# Altium PCB SPEC_A7_Management.PCBDOC (part 1 of 4)
Units mm, origin at the board's own origin, x right, y up, seen from the top; angles counter-clockwise.
Board outline 141.1 x 65.84 mm, 4 copper layers (Top Layer, Layer 1, Layer 2, Bottom Layer), stack 1.566 mm thick; 177 components, 176 nets, 698 pads, 409 vias.
Unrouted connection lines stored in the file: 4.
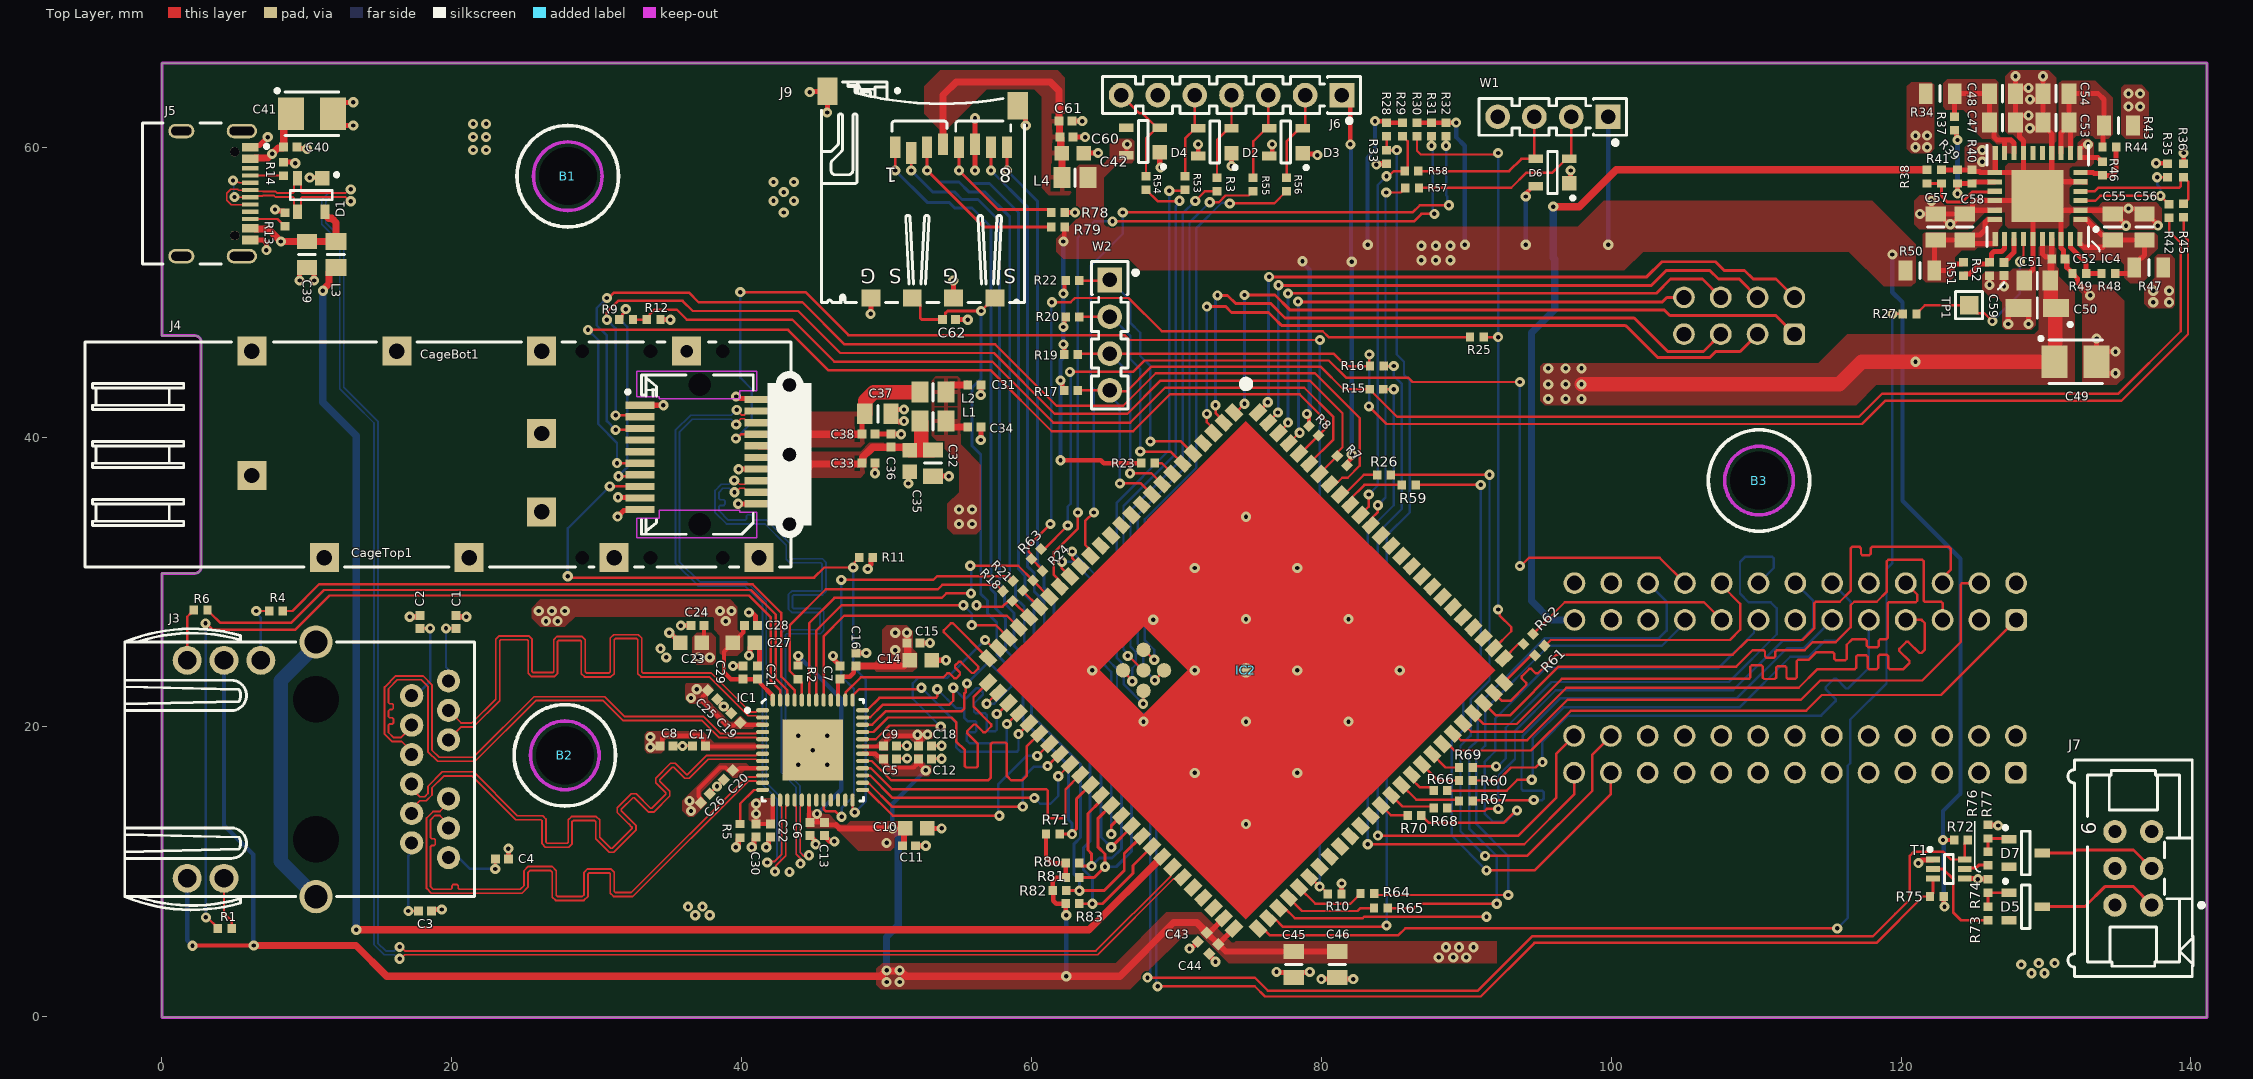
[diagram p0: Top Layer view]
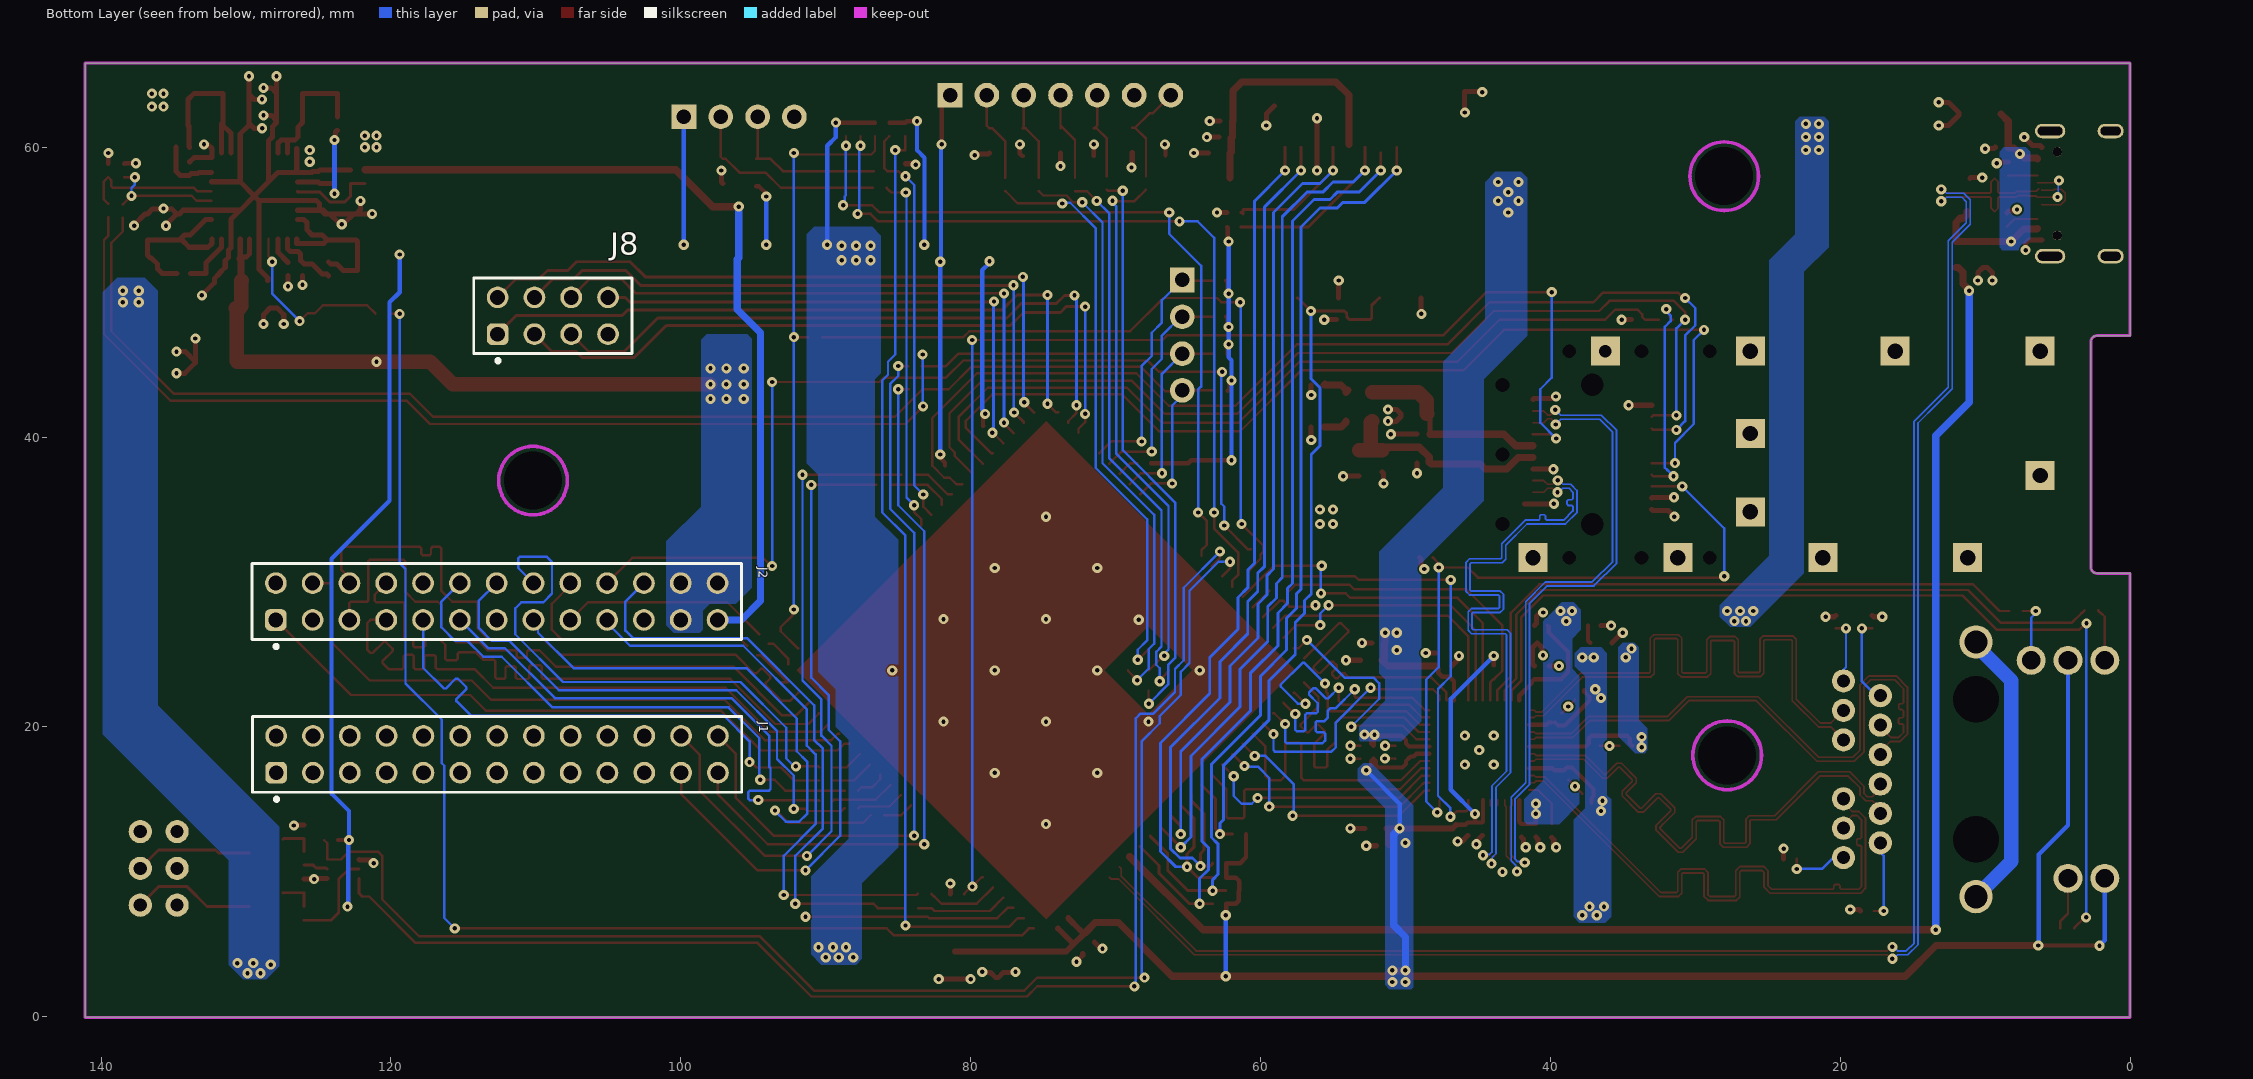
[diagram p1: Bottom Layer view, seen from below]
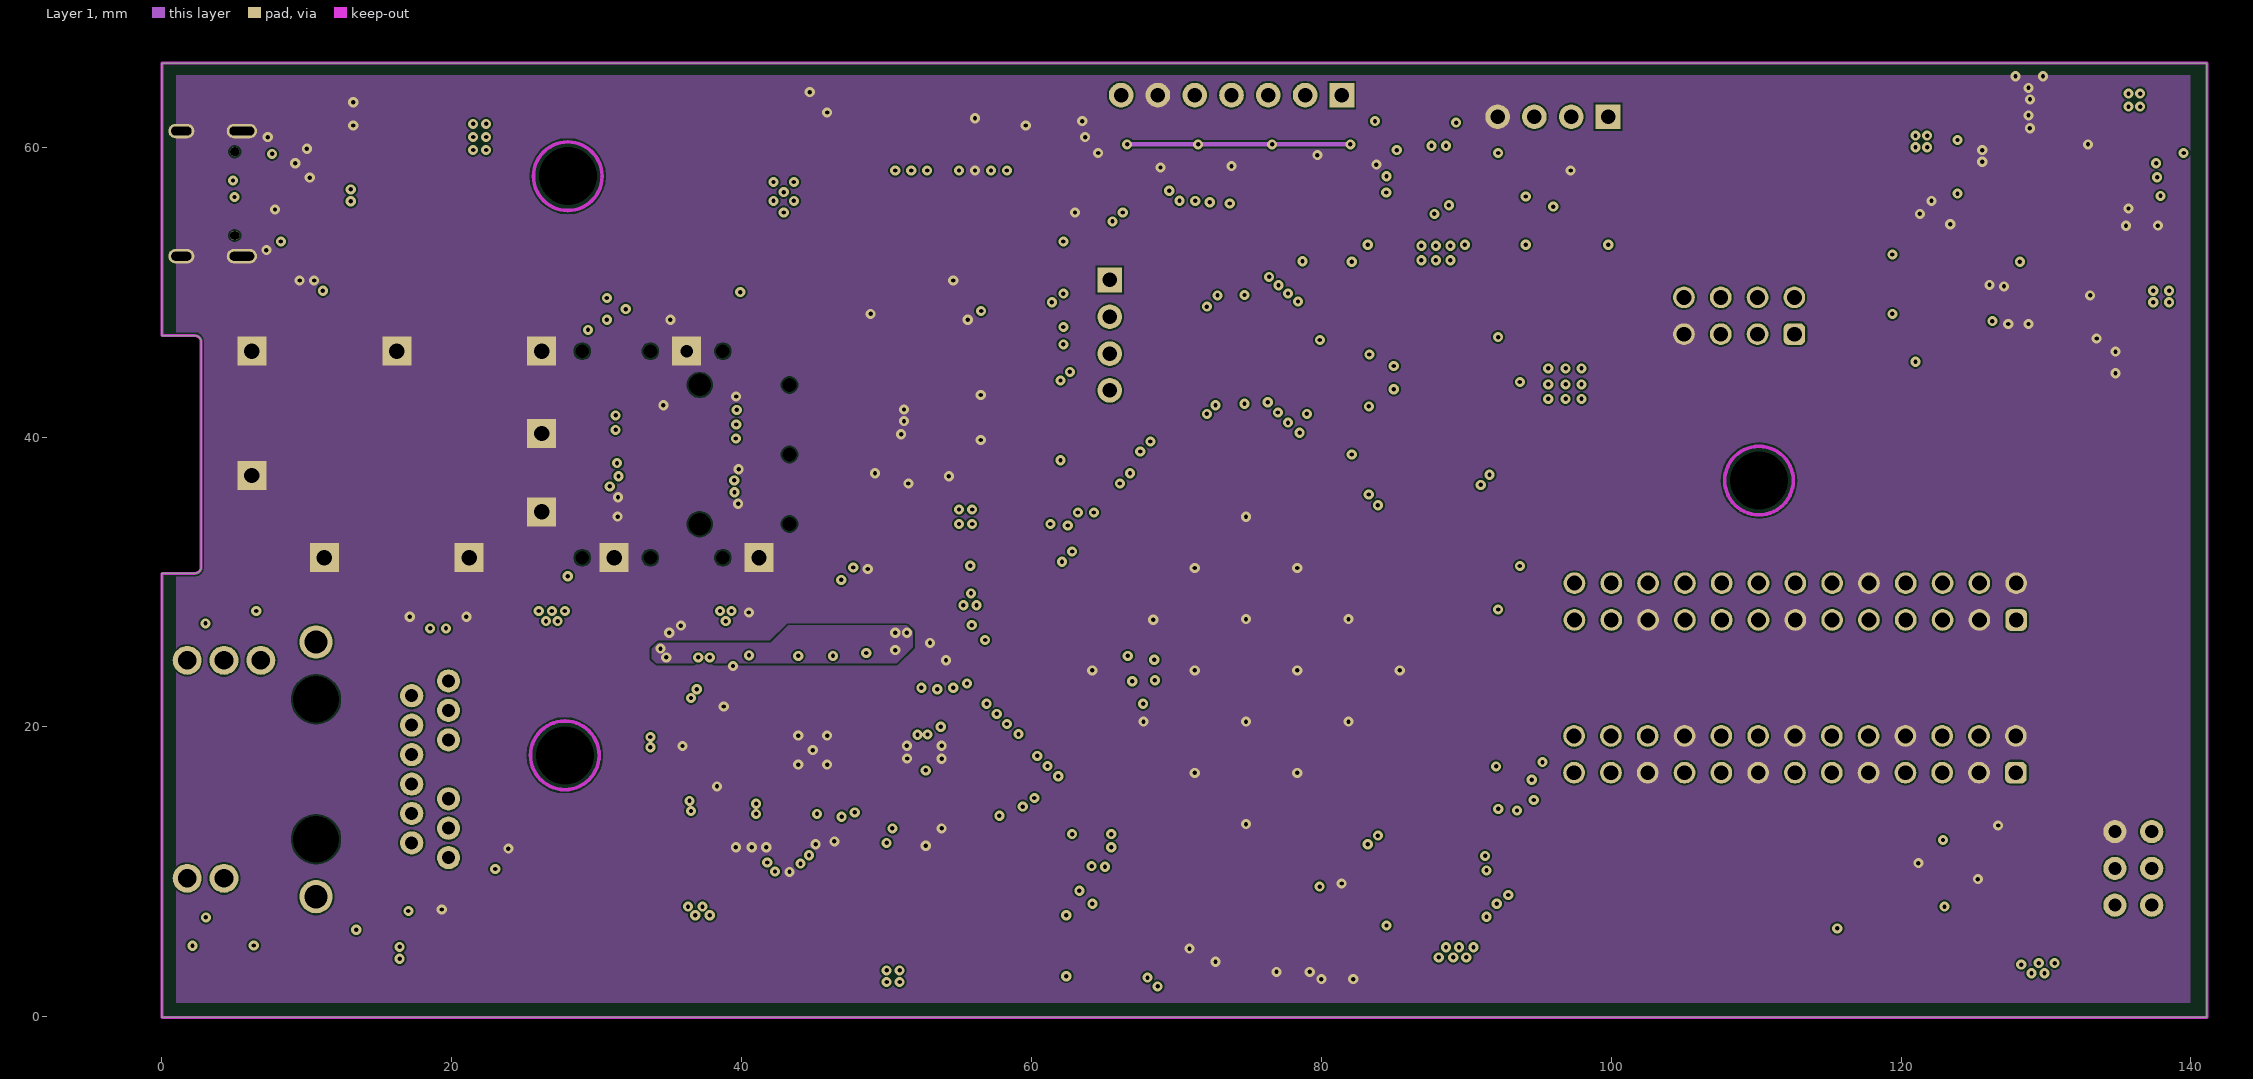
[diagram p2: Layer 1]
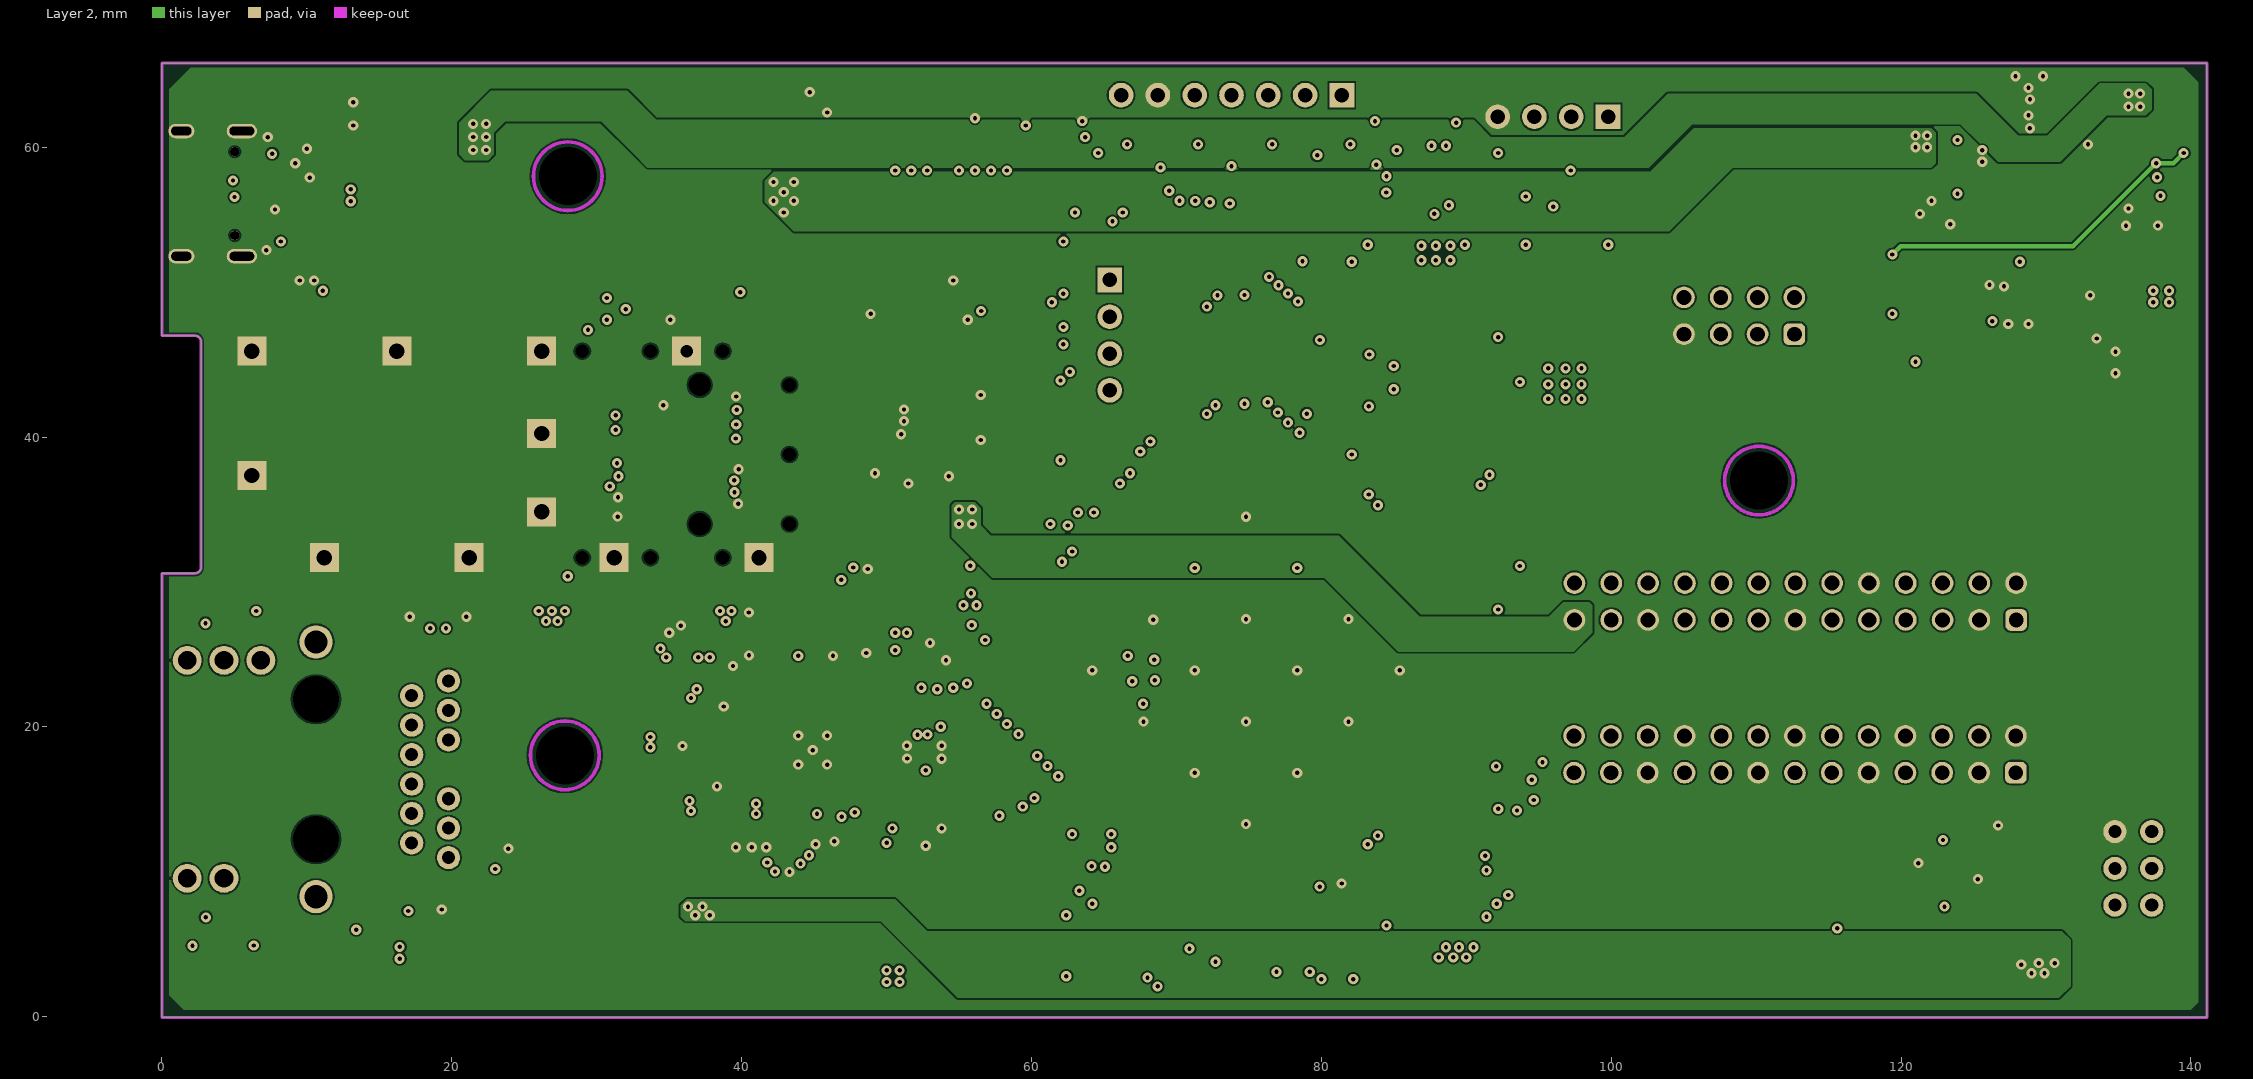
[diagram p3: Layer 2]
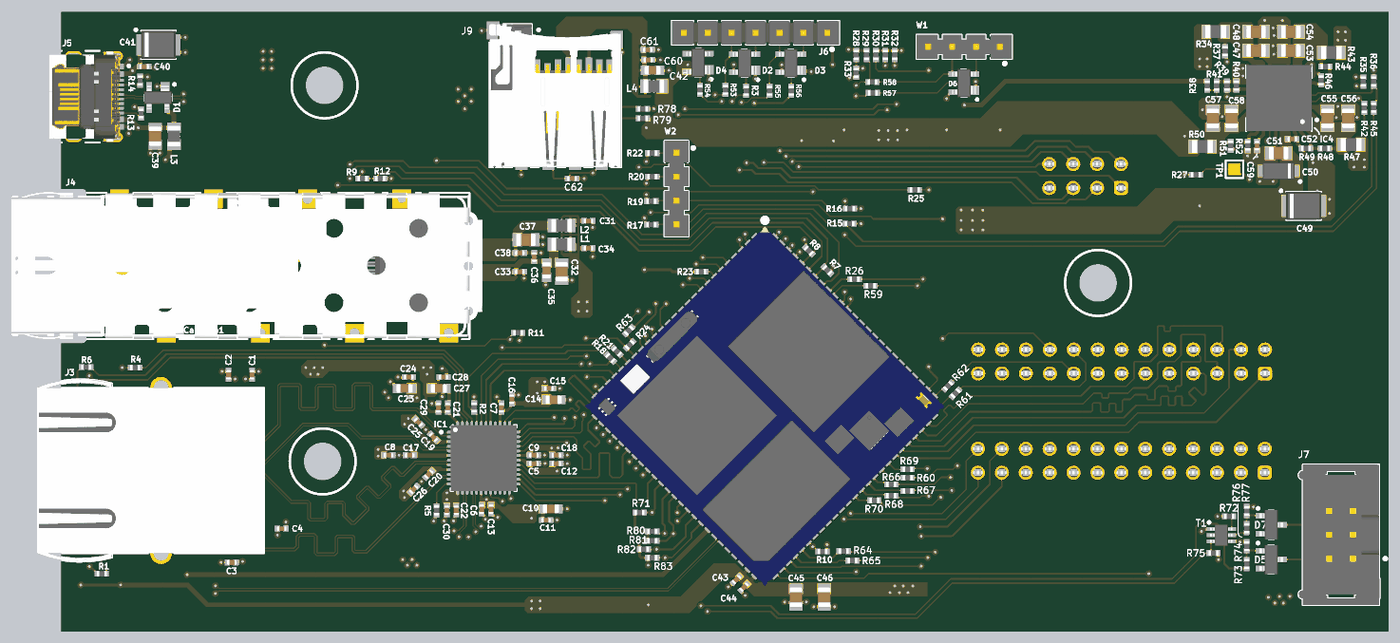
[diagram p6: 3D render of the assembled board from above, using the file's embedded part models]
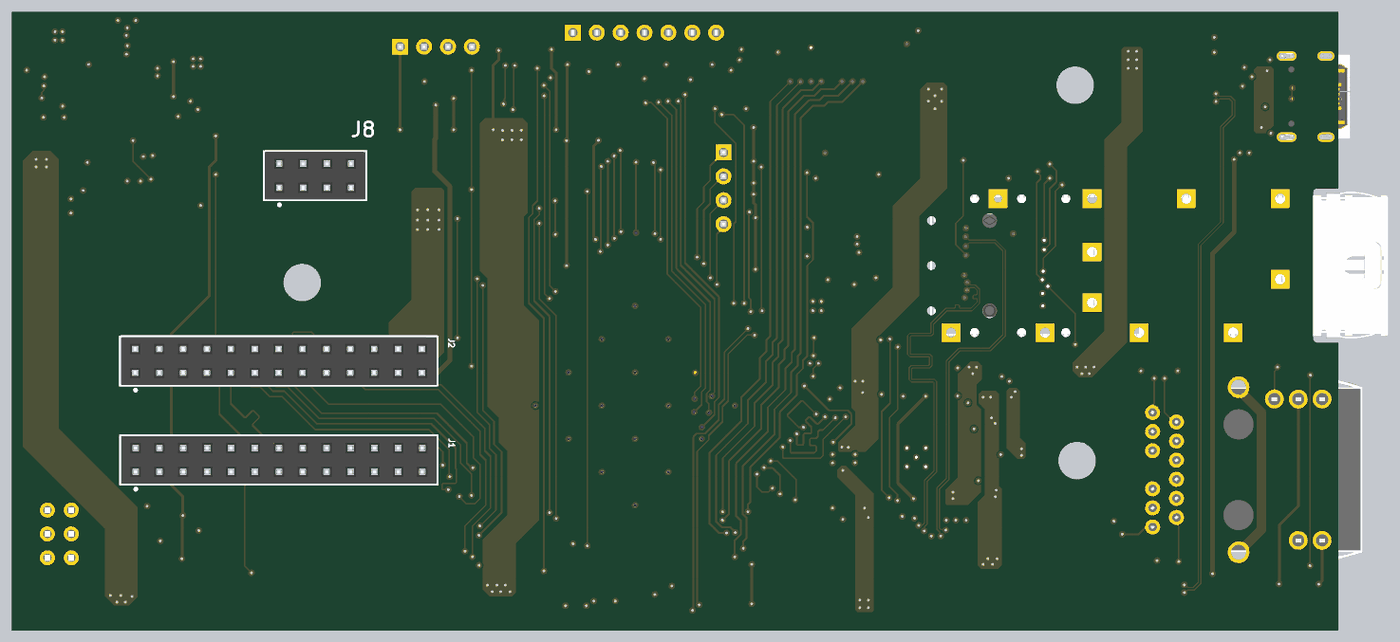
[diagram p7: 3D render of the assembled board from below, using the file's embedded part models]

## Layer stack, top to bottom
Top Solder: solder mask 0.0102, Solder Resist, Dk 3.5
Top Layer: signal copper 0.0325
Dielectric 2: prepreg 0.0994, PP-015, Dk 4.3
Layer 1: signal copper 0.0175
Dielectric 1: dielectric 1.2675, FR-4, Dk 4.8
Layer 2: signal copper 0.0175
Dielectric 3: prepreg 0.0994, PP-015, Dk 4.3
Bottom Layer: signal copper 0.0325
Bottom Solder: solder mask 0.0102, Solder Resist, Dk 3.5

## Board outline
0,-0.04 0,30.6 1,30.6 2.274,30.6 ccw(c2.274,31.026) 2.7,31.026 2.7,46.574 ccw(c2.274,46.574) 2.274,47 1,47 0,47 0,65.8 141.1,65.8 141.1,-0.04

## Design rules (kind name [scope] priority, off if disabled: settings)
Clearance [All] p1: gap=0.12 ignorepadtopadclearanceinfootprint=FALSE
DiffPairsRouting [All] p1: maxlimit=0.254 minlimit=0.15 mostfreqgap=0.254 toplayer_maxgap=0.15 toplayer_prefgap=0.15 toplayer_minwidth=0.123 toplayer_maxwidth=0.123 toplayer_prefwidth=0.123 bottomlayer_maxgap=0.15 bottomlayer_prefgap=0.15 bottomlayer_minwidth=0.123 bottomlayer_maxwidth=0.123 bottomlayer_prefwidth=0.123 impedanceprofiledriven=TRUE impedanceprofileid={EC51CA1E-BECF-47AB-B32E-768EA1588609} impedanceprofilevalue=100.000000 maxuncoupledlength=12.7
HoleSize [All] p1: absolutevalues=TRUE maxlimit=5 minlimit=0.025 maxpercent=80.000 minpercent=20.000
HoleToHoleClearance [All] p1: gap=0.3 allowstackedmicrovias=TRUE
MinimumSolderMaskSliver [All] p1: minsoldermaskwidth=0
PolygonConnect PolygonConnect_PWR [InNetClass('PWR') or InNet('GND')] p1: connectstyle=Direct reliefconductorwidth=0.254 reliefentries=4 polygonreliefangle="90 Angle" airgapwidth=0.254
PolygonConnect [All] p2: thpad.connectstyle=Direct thpad.reliefconductorwidth=0.254 thpad.reliefentries=4 thpad.polygonreliefangle="90 Angle" thpad.airgapwidth=0.254 smdpad.connectstyle=Relief smdpad.reliefconductorwidth=0.3 smdpad.reliefentries=4 smdpad.polygonreliefangle="90 Angle" smdpad.airgapwidth=0.2 via.connectstyle=Direct via.reliefconductorwidth=0.254 via.reliefentries=4 via.polygonreliefangle="90 Angle" via.airgapwidth=0.254
RoutingVias [All] p1: holewidth=0.4 width=0.8 viastyle="Through Hole" minholewidth=0.3 minwidth=0.6 maxholewidth=1 maxwidth=1.5
SilkToSilkClearance [All] p1: silktosilkclearance=0
SilkToSolderMaskClearance [IsPad] p1: minsilkscreentomaskgap=0 clearancetoexposedcopper=TRUE
SolderMaskExpansion [All] p1: expansion=0.051 istentingtop=FALSE
SupplyNets "Schematic Supply Nets_13" [InNet('SFP_VCCR')] p1: voltage=0.000
SupplyNets "Schematic Supply Nets_12" [InNet('P3V3')] p2: voltage=0.000
SupplyNets "Schematic Supply Nets_11" [InNet('P5V_USB')] p3: voltage=0.000
SupplyNets "Schematic Supply Nets_10" [InNet('P1V1')] p4: voltage=0.000
SupplyNets "Schematic Supply Nets_9" [InNet('SFP_VCCT')] p5: voltage=0.000
SupplyNets "Schematic Supply Nets_8" [InNet('P3V3_SoM')] p6: voltage=0.000
SupplyNets "Schematic Supply Nets_7" [InNet('P12V0')] p7: voltage=0.000
SupplyNets "Schematic Supply Nets_6" [InNet('CHASSIS')] p8: voltage=0.000
SupplyNets "Schematic Supply Nets_5" [InNet('P12V_B')] p9: voltage=0.000
SupplyNets "Schematic Supply Nets_4" [InNet('GND')] p10: voltage=0.000
SupplyNets "Schematic Supply Nets_3" [InNet('P2V5')] p11: voltage=0.000
SupplyNets "Schematic Supply Nets_2" [InNet('P12V_A')] p12: voltage=0.000
SupplyNets "Schematic Supply Nets_1" [InNet('P3V3_SD')] p13: voltage=0.000
SupplyNets "Schematic Supply Nets" [InNet('P1V8')] p14: voltage=0.000
Width Width_PWR [InNetClass('PWR')] p1: maxlimit=3 minlimit=0.3 preferedwidth=0.5 minimp=50.000000 maximp=50.000000 favimp=50.000000
Width Width_S50 [InNetClass('SE50')] p2: maxlimit=0.254 minlimit=0.166 preferedwidth=0.254 toplayer_maxwidth=0.166 toplayer_prefwidth=0.166 bottomlayer_maxwidth=0.166 bottomlayer_prefwidth=0.166 impedanceprofiledriven=TRUE impedanceprofileid={F6893002-8B16-48FB-998A-99381A82A4D8} impedanceprofilevalue=50.000000 minimp=50.000000 maximp=50.000000 favimp=50.000000
Width [All] p3: maxlimit=2 minlimit=0.12 preferedwidth=0.12
24 further rules are at their usual default settings.

## Classes and differential pairs
net class FPGA_RGMII_RXTX: ENET2_RX_CLK ENET2_RX_CTRL ENET2_RXD0 ENET2_RXD1 ENET2_RXD2 ENET2_RXD3 ENET2_TX_CLK ENET2_TX_CTRL ENET2_TXD0 ENET2_TXD1 ENET2_TXD2 ENET2_TXD3
net class PWR: NetC47_2 NetC53_2 NetC55_2 NetC57_2 P1V1 P1V8 P2V5 P3V3_SoM P12V0
component class U_SPEC_A7: J1 J2 J8 R26 R59 R60 R61 R62 R63 R64 R65 R66 R67 R68 R69 R70
component class U_SPEC_A7_SoM: C39 C40 C41 C42 C43 C44 C45 C46 C60 C61 C62 D1 D2 D3 D4 D6 IC2 J5 J6 J9 L3 L4 PB1 R3 R13 R14 R15 R16 R17 R18 R19 R20 R21 R22 R23 R24 R25 R27 R28 R29 R30 R31 R32 R33 R53 R54 R55 R56 R57 R58 R71 R78 R79 R80 R81 R82 R83 W1 W2
component class U_SPEC_A7_Power: C47 C48 C49 C50 C51 C52 C53 C54 C55 C56 C57 C58 C59 D5 D7 IC4 J7 R34 R35 R36 R37 R38 R39 R40 R41 R42 R43 R44 R45 R46 R47 R48 R49 R50 R51 R52 R72 R73 R74 R75 R76 R77 T1 TP1
component class U_ETH_PHY_SFP: C1 C2 C3 C4 C5 C6 C7 C8 C9 C10 C11 C12 C13 C14 C15 C16 C17 C18 C19 C20 C21 C22 C23 C24 C25 C26 C27 C28 C29 C30 C31 C32 C33 C34 C35 C36 C37 C38 CageBot1 CageTop1 IC1 J3 J4 L1 L2 R1 R2 R4 R5 R6 R7 R8 R9 R10 R11 R12
component class SPEC_A7_Managment-TOP: B1 B2 B3 MECH1 MECH2 MECH3
net class SE50: ENET1_RX_CLK ENET1_RX_CTRL ENET1_RXD0 ENET1_RXD1 ENET1_RXD2 ENET1_RXD3 ENET1_TX_CLK ENET1_TX_CTRL ENET1_TXD0 ENET1_TXD1 ENET1_TXD2 ENET1_TXD3 ENET2_RX_CLK ENET2_RX_CTRL ENET2_RXD0 ENET2_RXD1 ENET2_RXD2 ENET2_RXD3 ENET2_TX_CLK ENET2_TX_CTRL ENET2_TXD0 ENET2_TXD1 ENET2_TXD2 ENET2_TXD3 RGMII_RX_CTRL RGMII_TX_CTRL TRGMII_TX_CLK TRGMII_TX_EN TRGMII_TXD0 TRGMII_TXD1 TRGMII_TXD2 TRGMII_TXD3
net class 1000BASET: MDI0_N MDI0_P MDI1_N MDI1_P MDI2_N MDI2_P MDI3_N MDI3_P
net class RGMII_RXTX: ENET1_RX_CLK ENET1_RX_CTRL ENET1_RXD0 ENET1_RXD1 ENET1_RXD2 ENET1_RXD3 ENET1_TX_CLK ENET1_TX_CTRL ENET1_TXD0 ENET1_TXD1 ENET1_TXD2 ENET1_TXD3 RGMII_RX_CTRL RGMII_TX_CTRL
net class D100: MDI0_N MDI0_P MDI1_N MDI1_P MDI2_N MDI2_P MDI3_N MDI3_P
differential pair SFPTX: +SFPTX_P -SFPTX_N
differential pair SFPRX: +SFPRX_P -SFPRX_N
differential pair USB_D: +USB_D_P -USB_D_N
differential pair MDI3: +MDI3_P -MDI3_N
differential pair MDI2: +MDI2_P -MDI2_N
differential pair MDI1: +MDI1_P -MDI1_N
differential pair MDI0: +MDI0_P -MDI0_N

## Components (designator, comment, footprint, x,y, rotation, side; value= is the part's Value field where it differs from the comment)
B1 "Non Plated Hole" MTG400#1 28,58 r0 top
B2 "Non Plated Hole" MTG400#2 28,18 r0 top
B3 "Non Plated Hole" MTG400#1 110.2,37 r0 top
C1 "100nF" CAPC1005X55N 20.3,27.25 r270 top
C2 "100nF" CAPC1005X55N 17.8,27.25 r270 top
C3 "100nF" CAPC1005X55N 18.15,7.3 r180 top
C4 "100nF" CAPC1005X55N 23.45,10.9 r180 top
C5 "100nF" CAPC1005X55N 50.25,17.8 r180 top
C6 "100nF" CAPC1005X55N 44.7,12.95 r90 top
C7 "100nF" CAPC1005X55N 46.8,23.75 r270 top
C8 "100nF" CAPC1005X55N 34.8,18.7 r180 top
C9 "100nF" CAPC1005X55N 50.25,18.7 r180 top
C10 "10uF" CAPC1608X80N 52.05,13 r180 top
C11 "10nF" CAPC1005X55N 51.55,11.8 r180 top
C12 "1uF" CAPC1005X55N 52.65,17.8 r180 top
C13 "1uF" CAPC1005X55N 45.7,12.95 r90 top
C14 "10uF" CAPC1608X80N 52.35,24.6 r180 top
C15 "10nF" CAPC1005X55N 51.85,25.8 r180 top
C16 "1uF" CAPC1005X55N 47.9,24.65 r270 top
C17 "1uF" CAPC1005X55N 37.05,18.7 r0 top
C18 "1uF" CAPC1005X55N 52.65,18.7 r180 top
C19 "100nF" CAPC1005X55N 39.582,20.618 r315 top
C20 "100nF" CAPC1005X55N 39.082,16.682 r45 top
C21 "100nF" CAPC1005X55N 41.1,23.75 r270 top
C22 "100nF" CAPC1005X55N 42,12.85 r90 top
C23 "10uF" CAPC1608X80N 36.5,25.8 r0 top
C24 "10nF" CAPC1005X55N 36.95,27 r0 top
C25 "1uF" CAPC1005X55N 37.982,22.218 r135 top
C26 "1uF" CAPC1005X55N 37.482,15.082 r225 top
C27 "10uF" CAPC1608X80N 40.15,25.8 r180 top
C28 "10nF" CAPC1005X55N 40.65,27 r180 top
C29 "1uF" CAPC1005X55N 40.1,23.75 r270 top
C30 "1uF" CAPC1005X55N 41,12.85 r90 top
C31 "100nF" CAPC1005X55N 56.05,43.6 r180 top
C32 "22uF" CAPC2012X135N 53.2,38.2 r90 top
C33 "100nF" CAPC1005X55N 48.75,38.2 r180 top
C34 "1uF" CAPC1005X55N 56.05,40.7 r180 top
C35 "10uF" CAPC1608X80N 51.6,38.35 r90 top
C36 "1uF" CAPC1005X55N 50.3,39.75 r270 top
C37 "22uF" CAPC2012X135N 49.4,41.6 r180 top
C38 "100nF" CAPC1005X55N 48.75,40.2 r180 top
C39 "22uF" CAPC2012X135N 10,52.6 r90 top
C40 "100nF" CAPC1005X55N 8.85,60 r180 top
C41 "33uF" CAPMP3528X210N 10.35,62.3 r0 top
C42 "10uF" CAPC1608X80N 62.85,59.6 r180 top
C43 "100nF" CAPC1005X55N 71.782,5.482 r45 top
C44 "100nF" CAPC1005X55N 72.582,4.682 r45 top
C45 "22uF" CAPC2012X135N 78.1,3.6 r90 top
C46 "22uF" CAPC2012X135N 81.1,3.6 r90 top
C47 "22uF" CAPC2012X135N 127,61.7 r180 top
C48 "22uF" CAPC2012X135N 127,63.7 r180 top
C49 "33uF" CAPMP3528X210N 132.05,45.2 r0 top
C50 "10uF" CAPMP3216X180N 129.4,48.9 r180 top
C51 "22uF" CAPC2012X135N 129.4,50.8 r0 top
C52 "100nF" CAPC1005X55N 130.85,52.3 r180 top
C53 "22uF" CAPC2012X135N 130.7,61.7 r0 top
C54 "22uF" CAPC2012X135N 130.7,63.7 r0 top
C55 "22uF" CAPC2012X135N 134.6,54.5 r270 top
C56 "22uF" CAPC2012X135N 136.8,54.5 r270 top
C57 "22uF" CAPC2012X135N 122.4,54.5 r270 top
C58 "22uF" CAPC2012X135N 124.4,54.5 r270 top
C59 "1uF" CAPC1005X55N 127.1,51.6 r90 top
C60 "1uF" CAPC1005X55N 62.4,60.7 r180 top
C61 "100nF" CAPC1005X55N 62.35,61.8 r180 top
C62 "100nF" CAPC1005X55N 54.3,48.1 r180 top
CageBot1 "SFP" TYCO_6367034-1 37.1,38.8 r0 top locked
CageTop1 "SFP" TYCO_6367035-1 37.1,38.8 r0 top locked
D1 "PRTR5V0U2X" SOT190P230X110-4N 10.3,56.7 r270 top
D2 "PRTR5V0U2X" SOT190P230X110-4N 72.65,60.35 r180 top
D3 "PRTR5V0U2X" SOT190P230X110-4N 77.55,60.35 r180 top
D4 "PRTR5V0U2X" SOT190P230X110-4N 67.7,60.4 r180 top
D5 "BZX84B10V" SOT95P248X115-3N 128.6,7.6 r0 top
D6 "PRTR5V0U2X" SOT190P230X110-4N 95.95,58.25 r180 top
D7 "BZX84B10V" SOT95P248X115-3N 128.6,11.3 r0 top
IC1 "DP83869HMRGZ" QFN50P700X700X100-49N-S420 44.9,18.4 r0 top
IC2 "QSMP-QS93" KARO_QSMP-1530 74.8,23.9 r315 top
IC4 "MPM54304GMN-002" MPS_MPM54304GMN 129.425,56.637 r180 top
J1 "61302621821" 61302621821 112.681,18.11 r180 bottom
J2 "61302621821" 61302621821 112.705,28.651 r180 bottom
J3 "RJ45" BEL_L829-1J1T-43 18.5,17.075 r90 top locked
J4 "SFP" TYCO_1367073-1 37.1,38.8 r0 top locked
J5 "USB4105-GF-A" FP-USB4105-GF-A-MFG 2.5,56.8 r270 top
J6 "Header 7" SAMTEC_TSW-107-07-L-S-LL 81.42,63.6 r180 top
J7 "Header 6" 3M_N2506-6002RB 136.03,10.24 r90 top
J8 "61300821821" 61300821821 108.83,48.37 r180 bottom
J9 "microSD" ATTEND_112A-TAAR-R03 54.45,60 r180 top
L1 "220R@100MHz" INDC2012X105N 53.2,41.1 r180 top
L2 "220R@100MHz" INDC2012X105N 53.2,43.1 r180 top
L3 "220R@100MHz" INDC2012X105N 12,52.6 r90 top
L4 "220R@100MHz" INDC2012X105N 63,57.9 r180 top
R1 "240" RESC1005X40N 4.33,6.1 r0 top
R2 "10k" RESC1005X40N 43.9,23.77 r90 top
R3 "22" RESC1005X40N 72.8,57.43 r90 top
R4 "240" RESC1005X40N 7.87,28 r180 top
R5 "11k" RESC1005X40N 39.9,12.83 r270 top
R6 "240" RESC1005X40N 2.67,28.06 r180 top
R7 "10k" RESC1005X40N 81.432,38.368 r315 top
R8 "10k" RESC1005X40N 79.468,40.432 r135 top
R9 "0" RESC1005X40N 32.03,48.1 r0 top
R10 "10k" RESC1005X40N 80.919,8.467 r180 top
R11 "10k" RESC1005X40N 48.57,31.7 r180 top
R12 "10k" RESC1005X40N 33.93,48.1 r180 top
R13 "5k1" RESC1005X40N 8.5,55.01 r90 top
R14 "5k1" RESC1005X40N 8.4,58.5 r90 top
R15 "no_value" RESC1005X40N 83.8,43.3 r180 top
R16 "no_value" RESC1005X40N 83.83,44.9 r180 top
R17 "no_value" RESC1005X40N 62.73,43.2 r0 top
R18 "22" RESC1005X40N 58.368,29.032 r135 top
R19 "no_value" RESC1005X40N 62.73,45.7 r0 top
R20 "10k" RESC1005X40N 62.83,48.3 r0 top
R21 "22" RESC1005X40N 59.068,29.732 r135 top
R22 "10k" RESC1005X40N 62.83,50.8 r0 top
R23 "10k" RESC1005X40N 68.03,38.2 r0 top
R24 "0" RESC1005X40N 60.432,30.432 r45 top
R25 "no_value" RESC1005X40N 90.73,46.9 r180 top
R26 "1k" RESC1005X40N 84.33,37.4 r180 top
R27 "0" RESC1005X40N 120.6,48.5 r180 top
R28 "no_value" RESC1005X40N 84.5,61.23 r90 top
R29 "no_value" RESC1005X40N 85.6,61.23 r90 top
R30 "no_value" RESC1005X40N 86.6,61.23 r90 top
R31 "no_value" RESC1005X40N 87.6,61.23 r90 top
R32 "no_value" RESC1005X40N 88.6,61.23 r90 top
R33 "0" RESC1005X40N 84.5,59.33 r90 top
R34 "0" RESC2012X60N 122.7,63.7 r180 top
R35 "68k" RESC1005X40N 138.4,58.4 r90 top
R36 "68k" RESC1005X40N 139.5,58.4 r90 top
R37 "10k" RESC1005X40N 123.7,61.63 r90 top
R38 "240" RESC1005X40N 121.8,57.97 r90 top
R39 "24k" RESC1005X40N 123.9,57.97 r270 top
R40 "24k" RESC1005X40N 124.9,57.97 r270 top
R41 "10k" RESC1005X40N 122.8,57.97 r270 top
R42 "0" RESC1005X40N 138.5,55.6 r90 top
R43 "0" RESC2012X60N 135,61.5 r0 top
R44 "15k" RESC1005X40N 134.37,60 r180 top
R45 "0" RESC1005X40N 139.5,55.63 r90 top
R46 "7k5" RESC1005X40N 133.9,58.53 r270 top
R47 "0" RESC2012X60N 137.1,51.7 r0 top
R48 "24k" RESC1005X40N 134.3,51.3 r0 top
R49 "7k5" RESC1005X40N 132.3,51.3 r0 top
R50 "0" RESC2012X60N 121.3,51.5 r180 top
R51 "68k" RESC1005X40N 124.3,51.6 r90 top
R52 "15k" RESC1005X40N 126.1,51.6 r90 top
R53 "22" RESC1005X40N 70.6,57.53 r270 top
R54 "22" RESC1005X40N 67.9,57.53 r90 top
R55 "22" RESC1005X40N 75.3,57.43 r270 top
R56 "22" RESC1005X40N 77.6,57.43 r90 top
R57 "22" RESC1005X40N 86.27,57.2 r0 top
R58 "22" RESC1005X40N 86.223,58.353 r180 top
R59 "1k" RESC1005X40N 86.03,36.7 r180 top
R60 "33" RESC1005X40N 89.97,16.3 r180 top
R61 "1k" RESC1005X40N 95.068,25.268 r225 top
R62 "1k" RESC1005X40N 94.268,26.068 r225 top
R63 "1k" RESC1005X40N 60.332,31.932 r225 top
R64 "1k" RESC1005X40N 83.17,8.5 r180 top
R65 "1k" RESC1005X40N 84.1,7.5 r180 top
R66 "33" RESC1005X40N 88.23,15.6 r180 top
R67 "33" RESC1005X40N 89.97,14.9 r180 top
R68 "33" RESC1005X40N 88.23,14.4 r180 top
R69 "33" RESC1005X40N 89.97,17.2 r180 top
R70 "33" RESC1005X40N 86.43,13.9 r180 top
R71 "10k" RESC1005X40N 61.47,12.6 r0 top
R72 "10k" RESC1005X40N 124.13,12.2 r180 top
R73 "10k" RESC1005X40N 126,7.13 r90 top
R74 "10k" RESC1005X40N 126,9.03 r270 top
R75 "10k" RESC1005X40N 122.47,8.3 r0 top
R76 "10k" RESC1005X40N 126,10.93 r90 top
R77 "10k" RESC1005X40N 126,12.77 r270 top
R78 "10k" RESC1005X40N 61.83,55.5 r0 top
R79 "10k" RESC1005X40N 61.83,54.5 r0 top
R80 "10k" RESC1005X40N 62.83,10.6 r180 top
R81 "10k" RESC1005X40N 62.83,9.6 r180 top
R82 "10k" RESC1005X40N 61.93,8.7 r180 top
R83 "10k" RESC1005X40N 62.83,7.8 r180 top
T1 "BC847BS" SOT65P210X110-6N 123.3,10.2 r0 top
TP1 "Test Point" TPS127 124.7,49.1 r0 top
W1 "Header 4" SAMTEC_HTSW-104-23-L-S 99.78,62.1 r180 top
W2 "Header 4" SAMTEC_HTSW-104-23-L-S 65.4,50.84 r270 top

## Footprints (in the part's own frame and the unit in brackets; to place one, negate y for a bottom-side part, rotate by r counter-clockwise, add the part's x,y. Pads: shape width x height; smd on the part's side, far side on the other; paste and mask are expansions set on the pad)
3M_N2506-6002RB [mm] "8 Contacts - Straight .100\" x .100\" Low Profile Four-Wall Header (Solder Tail 2.84mm)"
  round 1.6 hole 0.9: 1(-2.54,-1.27) 2(-2.54,1.27) 3(0,-1.27) 4(0,1.27) 5(2.54,-1.27) 6(2.54,1.27)
  silkscreen extent -7.47,-4.85 7.47,4.52, body extent -7.47,-4.11 7.47,4.52, height 9.91
61300821821 [mm] "Socket Header, Pitch 2.54 mm, THT, Vertical, dual row, 8p"
  rrect50% 1.5x1.5 hole 1.02: 1(-3.81,-1.27)
  round 1.5 hole 1.02: 2(-3.81,1.27) 3(-1.27,-1.27) 4(-1.27,1.27) 5(1.27,-1.27) 6(1.27,1.27) 7(3.81,-1.27) 8(3.81,1.27)
  silkscreen extent -5.46,-3.22 5.46,2.62, body extent -5.33,-2.54 5.33,2.54, height 8.45
61302621821 [mm] "Socket Header, Pitch 2.54 mm, THT, Vertical, dual row, 26p"
  rrect50% 1.5x1.5 hole 1.02: 1(-15.24,-1.27)
  round 1.5 hole 1.02: 2(-15.24,1.27) 3(-12.7,-1.27) 4(-12.7,1.27) 5(-10.16,-1.27) 6(-10.16,1.27) 7(-7.62,-1.27) 8(-7.62,1.27) 9(-5.08,-1.27) 10(-5.08,1.27) 11(-2.54,-1.27) 12(-2.54,1.27) 13(0,-1.27) 14(0,1.27) 15(2.54,-1.27) 16(2.54,1.27) 17(5.08,-1.27) 18(5.08,1.27) 19(7.62,-1.27) 20(7.62,1.27) 21(10.16,-1.27) 22(10.16,1.27) 23(12.7,-1.27) 24(12.7,1.27) 25(15.24,-1.27) 26(15.24,1.27)
  silkscreen extent -16.89,-3.22 16.89,2.62, body extent -16.76,-2.54 16.76,2.54, height 8.45
ATTEND_112A-TAAR-R03 [mm] "MicroSD Socket, Push-Push Type"
  rect 0.7x1.5 smd: 1(3.85,0) 2(2.75,0.4) 3(1.65,0) 4(0.55,-0.2) 5(-0.55,0) 6(-1.65,-0.2) 7(-2.75,0) 8(-3.85,0)
  rect 1.4x1.9 smd: 9(-4.6,-2.85) 9(8.53,-3.85)
  rect 1.3x1.2 smd: 9(-0.17,10.4) 9(5.53,10.4) 10(-3.02,10.4) 10(2.68,10.4)
  silkscreen extent -5.07,-4.5 8.93,10.7, body extent -5.07,-4.5 8.94,10.7, height 1.83
BEL_L829-1J1T-43 [mm] "1 Port, Yellow/Green-Orange LEDs, Gigabit Ethernet, MagJack Connector Module"
  round 1.6 hole 0.9: 1(-5.08,1.27) 2(-3.048,1.27) 3(-1.016,1.27) 4(1.016,1.27) 5(3.048,1.27) 6(5.08,1.27) 7(-6.096,-1.27) 8(-4.064,-1.27) 9(-2.032,-1.27) 10(2.032,-1.27) 11(4.064,-1.27) 12(6.096,-1.27)
  round 2 hole 1.3: 13(-7.52,14.22) 14(-7.52,16.76) 15(7.52,11.68) 16(7.52,14.22) 17(7.52,16.76)
  round 2.3 hole 1.6: 18(-8.79,7.87) 19(8.79,7.87)
  round 1 hole 3.2 unplated mask+1.1: 20(-4.825,7.87) 21(4.825,7.87)
  silkscreen extent -9.7,-3.06 9.7,21.07, body extent -9.7,-3.06 9.69,21.07, height 12.21
CAPC1005X55N [mm] "Capacitor, Non-Polarized, Chip; 1.00mm L X 0.50mm W X 0.70mm H, IPC Medium Density"
  rect 0.62x0.62 smd: 1(-0.45,0) 2(0.45,0)
  body extent -0.52,-0.27 0.53,0.28, height 0.55
CAPC1608X80N [mm] "Chip Capacitor, Body 1.6x0.8mm IPC Medium Density"
  rect 1x1 smd: 1(-0.75,0) 2(0.75,0)
  body extent -0.87,-0.47 0.88,0.48, height 0.8
CAPC2012X135N [mm] "Chip Capacitor, Body 2.0x1.25mm, IPC Medium Density"
  rect 1.05x1.4 smd: 1(-0.9,0) 2(0.9,0)
  silkscreen extent 0,-0.58 0,0.58, body extent -1.05,-0.67 1.05,0.68, height 1.25
CAPMP3216X180N [mm] "Capacitor, Polarized, Molded  Body 3.2x1.6mm, IPC Medium Density"
  rect 1.8x1.25 smd: 1(-1.3,0) 2(1.3,0)
  silkscreen extent -2.4,-0.7 0,1.25, body extent -1.7,-0.9 1.7,0.9, height 1.6
CAPMP3528X210N [mm] "Capacitor, Polarized, Molded  Body 3.5x2.8mm, IPC Medium Density"
  rect 1.8x2.25 smd: 1(-1.45,0) 2(1.45,0)
  silkscreen extent -2.52,-1.5 1.85,1.72, body extent -1.85,-1.5 1.85,1.5, height 2.1
FP-USB4105-GF-A-MFG [mm]
  rrect100% 1x2.1 hole 1.7 slot 0.6 at 0 deg paste-2539.97 mask+0: 1(-4.32,3.015) 2(4.32,3.015)
  rrect100% 1x1.8 hole 1.4 slot 0.6 at 0 deg paste-2539.97 mask+0: 3(-4.32,-1.165) 4(4.32,-1.165)
  rect 0.6x1.15 smd paste+0 mask+0: A1-B12(-3.2,3.59) A4-B9(-2.4,3.59) B1-A12(3.2,3.59) B4-A9(2.4,3.59)
  rect 0.3x1.15 smd paste+0 mask+0: A5(-1.25,3.59) A6(-0.25,3.59) A7(0.25,3.59) A8(1.25,3.59) B5(1.75,3.59) B6(0.75,3.59) B7(-0.75,3.59) B8(-1.75,3.59)
  round 0.65 hole 0.65 unplated paste-2539.97 mask+0: ""(-2.89,2.515) ""(2.89,2.515)
  silkscreen extent -4.86,-3.84 4.86,4.84, body extent -4.96,-3.94 4.96,4.27, height 0.25
INDC2012X105N [mm] "Chip Inductor, EIA 0805, Metric 2012, Body 2.0x1.25mm, IPC Medium Density"
  rect 1.15x1.45 smd: 1(-0.9,0) 2(0.9,0)
  silkscreen extent 0,-0.6 0,0.6, body extent -1.1,-0.7 1.1,0.7, height 1.1
KARO_QSMP-1530 [mm] "QFN, 0.65mm Pitch, 100 Pin,27.35mm L X 27.35mm W X 2.3mm H Body (w/Thermal Tab 24.3 X 24.3mm)"
  rect 1.1x0.75 smd: 1(-13.175,12) 2(-13.175,11) 3(-13.175,10) 4(-13.175,9) 5(-13.175,8) 6(-13.175,7) 7(-13.175,6) 8(-13.175,5) 9(-13.175,4) 10(-13.175,3) 11(-13.175,2) 12(-13.175,1) 13(-13.175,0) 14(-13.175,-1) 15(-13.175,-2) 16(-13.175,-3) 17(-13.175,-4) 18(-13.175,-5) 19(-13.175,-6) 20(-13.175,-7) 21(-13.175,-8) 22(-13.175,-9) 23(-13.175,-10) 24(-13.175,-11) 25(-13.175,-12) 51(13.175,-12) 52(13.175,-11) 53(13.175,-10) 54(13.175,-9) 55(13.175,-8) 56(13.175,-7) 57(13.175,-6) 58(13.175,-5) 59(13.175,-4) 60(13.175,-3) 61(13.175,-2) 62(13.175,-1) 63(13.175,0) 64(13.175,1) 65(13.175,2) 66(13.175,3) 67(13.175,4) 68(13.175,5) 69(13.175,6) 70(13.175,7) 71(13.175,8) 72(13.175,9) 73(13.175,10) 74(13.175,11) 75(13.175,12)
  rect 0.75x1.1 smd: 26(-12,-13.175) 27(-11,-13.175) 28(-10,-13.175) 29(-9,-13.175) 30(-8,-13.175) 31(-7,-13.175) 32(-6,-13.175) 33(-5,-13.175) 34(-4,-13.175) 35(-3,-13.175) 36(-2,-13.175) 37(-1,-13.175) 38(0,-13.175) 39(1,-13.175) 40(2,-13.175) 41(3,-13.175) 42(4,-13.175) 43(5,-13.175) 44(6,-13.175) 45(7,-13.175) 46(8,-13.175) 47(9,-13.175) 48(10,-13.175) 49(11,-13.175) 50(12,-13.175) 76(12,13.175) 77(11,13.175) 78(10,13.175) 79(9,13.175) 80(8,13.175) 81(7,13.175) 82(6,13.175) 83(5,13.175) 84(4,13.175) 85(3,13.175) 86(2,13.175) 87(1,13.175) 88(0,13.175) 89(-1,13.175) 90(-2,13.175) 91(-3,13.175) 92(-4,13.175) 93(-5,13.175) 94(-6,13.175) 95(-7,13.175) 96(-8,13.175) 97(-9,13.175) 98(-10,13.175) 99(-11,13.175) 100(-12,13.175)
  round 1 smd paste-1 mask+0.051: 101(0,0)
  round 1 smd: A1(-6,-4) A3(-6,-6) B2(-5,-5) C1(-4,-4) C3(-4,-6)
  Top Layer region: -12.15,12.15 12.15,12.15 12.15,-12.15 -12.15,-12.15 -12.15,-7.15 -2.85,-7.15 -2.85,-2.85 -7.15,-2.85 -7.15,-7.15 -12.15,-7.15
  silkscreen extent -14.22,13.73 -13.73,14.22, body extent -13.5,-13.5 13.5,13.5, height 2.4
MPS_MPM54304GMN [mm] "MPS LGA-33 Case, 0.65mm Pitch, Rect. ; 32 Pin, 7.00mm L X 7.00mm W X 2.10mm H body (w/Thermal Tab 3.55 X 3.55mm)"
  rect 0.975x0.35 smd paste-2539.97 mask-0.025: 1(-2.963,1.633) 2(-2.963,0.983) 3(-2.963,0.325) 4(-2.963,-0.313) 5(-2.963,-0.983) 6(-2.963,-1.633) 17(2.963,-1.633) 18(2.963,-0.975) 19(2.963,-0.325) 20(2.963,0.325) 21(2.963,0.983) 22(2.963,1.633)
  rect 0.35x0.975 smd paste-2539.97 mask-0.025: 7(-2.925,-2.963) 8(-2.275,-2.963) 9(-1.625,-2.963) 10(-0.975,-2.963) 11(-0.325,-2.963) 12(0.325,-2.963) 13(0.975,-2.963) 14(1.625,-2.963) 15(2.275,-2.963) 16(2.925,-2.963) 23(2.925,2.963) 24(2.275,2.963) 25(1.625,2.963) 26(0.975,2.963) 27(0.325,2.963) 28(-0.325,2.963) 29(-0.975,2.963) 30(-1.625,2.963) 31(-2.275,2.963) 32(-2.925,2.963)
  rect 3.6x3.6 smd paste-2539.97 mask-0.25: 33(0,0)
  silkscreen extent -4.15,-3.5 3.5,3.5, body extent -3.5,-3.5 3.5,3.5, height 2.1
MTG400#1 [mm] "Non Plated Through Hole: Hole Dia.=4mm"
  round 1 hole 4 unplated mask+1.5: 1(0,0)
MTG400#2 [mm] "Non Plated Through Hole: Hole Dia.=4mm"
  round 1 hole 4 unplated mask+1.5: 1(-0.203,0.04)
QFN50P700X700X100-49N-S420 [mm] "QFN, 0.50mm Pitch, Square; 48 Pin, 7.00mm L X 7.00mm W X 1mm H body (W/Thermal Tab 4.2mm X 4.2mm), IPC Medium Density"
  oval 0.9x0.3 smd: 1(-3.45,2.75) 2(-3.45,2.25) 3(-3.45,1.75) 4(-3.45,1.25) 5(-3.45,0.75) 6(-3.45,0.25) 7(-3.45,-0.25) 8(-3.45,-0.75) 9(-3.45,-1.25) 10(-3.45,-1.75) 11(-3.45,-2.25) 12(-3.45,-2.75) 25(3.45,-2.75) 26(3.45,-2.25) 27(3.45,-1.75) 28(3.45,-1.25) 29(3.45,-0.75) 30(3.45,-0.25) 31(3.45,0.25) 32(3.45,0.75) 33(3.45,1.25) 34(3.45,1.75) 35(3.45,2.25) 36(3.45,2.75)
  oval 0.3x0.9 smd: 13(-2.75,-3.45) 14(-2.25,-3.45) 15(-1.75,-3.45) 16(-1.25,-3.45) 17(-0.75,-3.45) 18(-0.25,-3.45) 19(0.25,-3.45) 20(0.75,-3.45) 21(1.25,-3.45) 22(1.75,-3.45) 23(2.25,-3.45) 24(2.75,-3.45) 37(2.75,3.45) 38(2.25,3.45) 39(1.75,3.45) 40(1.25,3.45) 41(0.75,3.45) 42(0.25,3.45) 43(-0.25,3.45) 44(-0.75,3.45) 45(-1.25,3.45) 46(-1.75,3.45) 47(-2.25,3.45) 48(-2.75,3.45)
  rect 4.2x4.2 smd paste-4: 49(0,0)
  silkscreen extent -4.62,-3.5 3.5,3.5, body extent -3.5,-3.5 3.5,3.5, height 1
RESC1005X40N [mm] "Chip Resistor, EIA 0402, Metric 1005, Body 1.0x0.5mm, IPC Medium Density"
  rect 0.58x0.62 smd: 1(-0.47,0) 2(0.47,0)
  body extent -0.52,-0.27 0.53,0.28, height 0.4
RESC2012X60N [mm] "Chip Resistor, EIA 0805, Metric 2012, Body 2.0x1.2mm, IPC Medium Density"
  rect 0.95x1.4 smd: 1(-1,0) 2(1,0)
  silkscreen extent 0,-0.55 0,0.55, body extent -1.1,-0.67 1.1,0.68, height 0.6
SAMTEC_HTSW-104-23-L-S [mm] "4 Contacts - Pitch 2.54mm - Single Row Through Mount Straigh Header (Post Lead 5.84mm, Tail Lead 2.92mm, Insulator 2.54mm)"
  rect 1.7x1.7 hole 1: 1(0,0)
  round 1.7 hole 1: 2(2.54,0) 3(5.08,0) 4(7.62,0)
  silkscreen extent -1.27,-1.27 8.89,1.93, body extent -1.27,-1.27 8.89,1.27, height 8.38
SAMTEC_TSW-107-07-L-S-LL [mm] "7 Contacts - Pitch 2.54mm - Single Row  Through Mount Straigh Header (Post Lead 5.84mm, Tail Lead 2.54mm, Insulator 2.54mm)"
  rect 1.7x1.7 hole 1: 1(0,0)
  round 1.7 hole 1: 2(2.54,0) 3(5.08,0) 4(7.62,0) 5(10.16,0) 6(12.7,0) 7(15.24,0)
  silkscreen extent -1.27,-1.27 16.51,1.93, body extent -1.27,-1.27 16.51,1.27, height 8.38
SOT65P210X110-6N [mm] "SOT363, SC70-6, SOT, 0.65mm Pitch, 6 Pin, 1.25mm W X 2.00mm L X 1.10mm H, IPC Medium Density"
  rect 0.95x0.4 smd: 1(-1.1,0.65) 2(-1.1,0) 3(-1.1,-0.65) 4(1.1,-0.65) 5(1.1,0) 6(1.1,0.65)
  silkscreen extent -1.42,-1 0.3,1.47, body extent -1.2,-1.1 1.2,1.1, height 1.1
SOT95P248X115-3N [mm] "SOT, 0.95mm Pitch; 3 Pin, 1.315mm W X 2.95mm L X 1.15mm H body, IPC Medium Density"
  rect 1.05x0.6 smd: 1(-1.15,0.95) 2(-1.15,-0.95) 3(1.15,0)
  silkscreen extent -1.52,-1.5 0.3,1.87, body extent -1.27,-1.55 1.27,1.55, height 1.15
SOT190P230X110-4N [mm] "SOT143, SOT, 1.90mm Pitch; 4 Pin, 1.30mm W X 2.90mm L X 1.10mm H body, IPC Medium Density"
  rect 1x1 smd: 1(-1.15,0.75)
  rect 1x0.6 smd: 2(-1.15,-0.95) 3(1.15,-0.95) 4(1.15,0.95)
  silkscreen extent -1.52,-1.45 0.33,1.88, body extent -1.25,-1.5 1.25,1.5, height 1.1
TPS127 [mm] "1.27 x  1.27mm SMD Test Point Area"
  rect 1.27x1.27 smd paste-1.27: 1(0,0)
  silkscreen extent -0.94,-0.94 0.94,0.94
TYCO_1367073-1 [mm] "20 Position, Pitch 0.8mm SFP Receptacle (Small Form-factor Pluggable)"
  rect 2x0.5 smd: 1(-4.1,3.395) 2(-4.1,2.595) 3(-4.1,1.795) 4(-4.1,0.995) 5(-4.1,0.195) 6(-4.1,-0.605) 7(-4.1,-1.405) 8(-4.1,-2.205) 9(-4.1,-3.005) 10(-4.1,-3.805) 11(4.1,-3.405) 12(4.1,-2.605) 13(4.1,-1.805) 14(4.1,-1.005) 15(4.1,-0.205) 16(4.1,0.595) 17(4.1,1.395) 18(4.1,2.195) 19(4.1,2.995) 20(4.1,3.795)
  round 0.5 hole 1.55 unplated mask+0.525: MTG1(0,4.795) MTG2(0,-4.805)
  Top Layer keep-out lines w0.1: -4.34,-5.755 -4.34,-4.395 -2.78,-4.395 -2.78,-3.855 2.78,-3.855 2.78,-3.995 3.94,-3.995 3.94,-4.805 3.94,-5.755 -4.34,-5.755 ; -4.34,3.985 -4.34,5.745 3.94,5.745 3.94,4.385 2.78,4.385 2.78,3.845 -2.78,3.845 -2.78,3.985 -4.34,3.985
  silkscreen extent -5.08,-5.51 3.7,5.5, body extent -4.5,-5.5 4.5,5.5, height 5.22
TYCO_6367034-1 [mm] "Cage bottom For Single Port SFP  (Small Form-factor Pluggable)"
  rect 2x2 hole 1.05: 21(-30.9,7.125) 22(-20.9,7.125) 23(-10.9,7.125) 25(-25.9,-7.125) 26(-15.9,-7.125) 27(-5.9,-7.125) 28(4.1,-7.125) 29(-30.9,-1.455) 30(-10.9,-3.955) 31(-10.9,1.445)
  rect 2x2 hole 0.85: 24(-0.9,7.125)
  round 0.5 hole 0.95 unplated mask+0.225: 32(-8.1,7.125) 33(-3.4,7.125) 34(1.6,7.125) 35(-8.1,-7.125) 36(-3.4,-7.125) 37(1.6,-7.125)
  silkscreen extent -42.4,-7.77 6.3,7.77, body extent -42.4,-7.77 6.1,7.77, height 8.8
TYCO_6367035-1 [mm] "Cage Top For Single Port SFP  (Small Form-factor Pluggable)"
  round 0.5 hole 0.95 unplated mask+0.225: 32(6.2,4.795) 33(6.2,-0.005) 34(6.2,-4.805)
  silkscreen extent -42.4,-7.77 6.3,7.77, body extent -42.4,-7.77 6.3,7.89, height 10.34

## Part data
B1 B2 B3: library part NON-PLATED_HOLE4.0, "Single Terminal Socket", Author="CERN DEM JMW", Component Type="Standard (No BOM)", ComponentHeight=0mm, CreateDate=22.03.2019, Family="Non Plated Hole", HelpURL=Undefined, LatestRevisionDate=22.03.2019, Mounted=No, PackageDescription="Non Plated Through Hole: Hole Dia.=4.0mm", Part Description="Non Plated Through Hole: Hole Dia.=4.0mm", Part Number=NON-PLATED_HOLE4.0, Pin Count=1, Sense=No, SMD=No, Socket=No, Status=None
C1 C2 C3 C4 C5 C6 C7 C8 C9 C19 C20 C21 C22 C31 C33 C38 C40 C43 C44 C52 C61 C62: library part CC0402_100NF_16V_10%_X7R, "Non-polarised capacitor", Case=0402, Manufacturer=GENERIC, Manufacturer1 ComponentHeight=0.55mm, Manufacturer1 Example=MURATA, Manufacturer1 Part Number=GRM155R71C104KA88D, Tolerance=±10%, Voltage=16V, Author="CERN DEM JLC", Component Type=Standard, CreateDate=05/12/2013, HelpURL=\\cern.ch\dfs\Applications\Altium\Datasheets\CC0402_X7R_MURATA_GRM.pdf, LatestRevisionDate=03/12/2007, Manufacturer Part Number=CC0402_100NF_16V_10%_X7R, Mounted=Yes, Part Description="SMD Multilayer Chip Ceramic Capacitor", Part Number=CC0402_100NF_16V_10%_X7R, Pin Count=2, Sense=No, SMD=Yes, Socket=No, Status="Not Recommended", TC=X7R
C10 C14 C23 C27 C35 C42: library part CC0603_10UF_16V_20%_X5R, "Non-polarised capacitor", Case=0603, Manufacturer=GENERIC, Manufacturer1 ComponentHeight=0.8mm, Manufacturer1 Example=MURATA, Manufacturer1 Part Number=GRM188R61C106MA73D, Tolerance=±20%, Voltage=16V, Author="CERN DEM MR", Component Type=Standard, CreateDate=02.03.2016, HelpURL=\\cern.ch\dfs\Applications\Altium\Datasheets\CC0603_X5R_MURATA_GRM.pdf, LatestRevisionDate=02.03.2016, Manufacturer Part Number=CC0603_10UF_16V_20%_X5R, Mounted=Yes, Part Description="SMD Multilayer Chip Ceramic Capacitor", Part Number=CC0603_10UF_16V_20%_X5R, Pin Count=2, Sense=No, SMD=Yes, Socket=No, Status=None, TC=X5R
C11 C15 C24 C28: library part CC0402_10NF_16V_10%_X7R, "Non-polarised capacitor", Case=0402, Manufacturer=GENERIC, Manufacturer1 ComponentHeight=0.55mm, Manufacturer1 Example=PHYCOMP, Manufacturer1 Part Number=223878715636, Tolerance=±10%, Voltage=16V, Author="CERN DEM JLC", Component Type=Standard, CreateDate=03.12.2007, HelpURL=\\cern.ch\dfs\Applications\Altium\Datasheets\CC0402_X7R_PHYCOMP.pdf, LatestRevisionDate=03.12.2007, Manufacturer Part Number=CC0402_10NF_16V_10%_X7R, Mounted=Yes, Part Description="SMD Multilayer Chip Ceramic Capacitor", Part Number=CC0402_10NF_16V_10%_X7R, Pin Count=2, Sense=No, SMD=Yes, Socket=No, Status="Not Recommended", TC=X7R
C12 C13 C16 C17 C18 C25 C26 C29 C30 C34 C36 C59 C60: library part CC0402_1UF_16V_10%_X5R, "Non-polarised capacitor", Case=0402, Manufacturer=GENERIC, Manufacturer1 ComponentHeight=0.55mm, Manufacturer1 Example=TDK, Manufacturer1 Part Number=C1005X5R1C105KT, Tolerance=±10%, Voltage=16V, Author="CERN DEM JLC", Component Type=Standard, HelpURL=\\cern.ch\dfs\Applications\Altium\Datasheets\CC0402_X5R_TDK_C.pdf, Manufacturer Part Number=CC0402_1UF_16V_10%_X5R, Mounted=Yes, Part Description="SMD Multilayer Chip Ceramic Capacitor", Part Number=CC0402_1UF_16V_10%_X5R, Pin Count=2, Sense=No, SMD=Yes, Socket=No, Status=Preferred, TC=X5R
  C12 C13 C16 C17 C18 C25 C26 C29 C30 C34 C36 C60: CreateDate=2012-10-25, LatestRevisionDate=2012-10-25
  C59: CreateDate=25.10.2012, LatestRevisionDate=25.10.2012
C32 C37 C39 C45 C46 C47 C48 C51 C53 C54 C55 C56 C57 C58: library part CC0805_22UF_16V_10%_X5R, "Non-polarised capacitor", Case=0805, Manufacturer=GENERIC, Manufacturer1 ComponentHeight=1.35mm, Manufacturer1 Example=TDK, Manufacturer1 Part Number=C2012X5R1C226KT, Tolerance=±10%, Voltage=16V, Author="CERN DEM JLC", Component Type=Standard, CreateDate=25.10.2012, HelpURL=\\cern.ch\dfs\Applications\Altium\Datasheets\CC0805_X5R_TDK_C.pdf, LatestRevisionDate=25.10.2012, Manufacturer Part Number=CC0805_22UF_16V_10%_X5R, Mounted=Yes, Part Description="SMD Multilayer Chip Ceramic Capacitor", Part Number=CC0805_22UF_16V_10%_X5R, Pin Count=2, Sense=No, SMD=Yes, Socket=No, Status=Preferred, TC=X5R
C41 C49: library part CTE3528-21_33UF_16V_10%, "Polarised capacitor", Case=B, Manufacturer=GENERIC, Manufacturer1 ComponentHeight=2.1mm, Manufacturer1 Example=AVX, Manufacturer1 Part Number=TAJB336K016R, Tolerance=±10%, Voltage=16V, Author="CERN DEM JLC", Component Type=Standard, CreateDate=03.12.2007, HelpURL=\\cern.ch\dfs\Applications\Altium\Datasheets\CTE_AVX_TAJ.pdf, LatestRevisionDate=03.12.2007, Manufacturer Part Number=CTE3528-21_33UF_16V_10%, Mounted=Yes, Part Description="Solid Tantalum Chip Capacitor", Part Number=CTE3528-21_33UF_16V_10%, Pin Count=2, Sense=No, SMD=Yes, Socket=No, Status=Preferred
C50: library part CTE3216-18_10UF_16V_20%_AVX_TCJ, "Polarised capacitor", Case=A, Manufacturer=AVX, Manufacturer Part Number=TCJA106M016R0200, Tolerance=±20%, Voltage=16V, Author="CERN DEM JLC", Component Type=Standard, ComponentHeight=1.8mm, CreateDate=29.03.2012, HelpURL=\\cern.ch\dfs\Applications\Altium\Datasheets\CTE_AVX_TCJ.pdf, LatestRevisionDate=29.03.2012, Mounted=Yes, Part Description="ESR 0R200 Tantalum Solid Electrolytic Chip Capacitor with Conductive Polymer Electrode", Part Number=CTE3216-18_10UF_16V_20%_AVX_TCJ, Pin Count=2, Sense=No, SMD=Yes, Socket=No, Status=Preferred
CageBot1: library part TYCO_6367034-1, "SFP  Cage Bottom (Small Form-factor Pluggable)", Manufacturer="TYCO ELECTRONICS", Author="CERN DEM JLC", ClassName=Component_Not_DRC, Component Type=Standard, ComponentHeight=8.8mm, ComponentLink1Description=Application, ComponentLink1URL=\\cern.ch\dfs\Applications\Altium\Datasheets\TYCO_SFP_Application.pdf, ComponentLink2Description="SFP Specification", ComponentLink2URL=\\cern.ch\dfs\Applications\Altium\Datasheets\Tyco_SFP_Specification.pdf, CreateDate=25.01.2010, Family=SFP, HelpURL=\\cern.ch\dfs\Applications\Altium\Datasheets\TYCO_6367034-1.pdf, LatestRevisionDate=25.01.2010, Manufacturer Part Number=TYCO_6367034-1, Mounted=Yes, Part Description="Cage bottom For Single Port SFP  (Small Form-factor Pluggable)", Part Number=TYCO_6367034-1, Pin Count=11, SMD=No, Socket=No, Status=None, Table=TYCO
CageTop1: library part TYCO_6367035-1, "SFP  Cage Top (Small Form-factor Pluggable)", Manufacturer="TYCO ELECTRONICS", Author="CERN DEM JLC", ClassName=Component_Not_DRC, Component Type=Standard, ComponentHeight=10mm, ComponentLink1Description=Application, ComponentLink1URL=\\cern.ch\dfs\Applications\Altium\Datasheets\TYCO_SFP_Application.pdf, ComponentLink2Description="SFP Specification", ComponentLink2URL=\\cern.ch\dfs\Applications\Altium\Datasheets\Tyco_SFP_Specification.pdf, CreateDate=25/01/2010, Datasheet=\\cern.ch\dfs\Applications\Altium\Datasheets\TYCO_6367035-1.pdf, Family=SFP, HelpURL=\\cern.ch\dfs\Applications\Altium\Datasheets\TYCO_6367035-1.pdf, LatestRevisionDate=25/01/2010, Manufacturer Part Number=TYCO_6367035-1, Mounted=Yes, Part Description="Cage Top For Single Port SFP  (Small Form-factor Pluggable)", Part Number=TYCO_6367035-1, Pin Count=0, SMD=No, Socket=No, Status=None, Table=TYCO
D1 D2 D3 D4 D6: "Ultra Low Capacitance Double Rail-to-Rail ESD Protection Diode", Case=SOT143B, Manufacturer="NXP SEMICONDUCTORS", Voltage=5.5V, Author="CERN DEM JLC", Bonding=No, Component Type=Standard, ComponentHeight=1.1mm, CreateDate=22.03.2011, Device=PRTR5V0U2X, HelpURL=\\cern.ch\dfs\Applications\Altium\Datasheets\PRTR5V0U2X.pdf, LatestRevisionDate=22.03.2011, Manufacturer Part Number=PRTR5V0U2X, Mounted=Yes, PackageDescription="SOT143B, SOT, 1.90mm Pitch; 4 Pin, 1.30mm W X 2.90mm L X 1.10mm H body, IPC Medium Density", Part Description="Ultra Low Capacitance (1pF) Double Rail-to-Rail ESD Protection Diode (8kV)", Part Number=PRTR5V0U2X, Pin Count=4, PressFit=No, Sense=No, SMD=Yes, Socket=No
D5 D7: "Diode Zener Anode Pin 1 Cathode Pin 3 (Pas de pin 2)", Case=SOT23-3, Manufacturer="VISHAY SEMICONDUCTORS", Power=300mW, Voltage=10V, Author="CERN DEM JLC", Bonding=No, Component Type=Standard, ComponentHeight=1.15mm, CreateDate=23.10.2013, Device=BZX84B10V, HelpURL=\\cern.ch\dfs\Applications\Altium\Datasheets\BZX84B10V.pdf, LatestRevisionDate=23.10.2013, Manufacturer Part Number=BZX84B10V, Mounted=Yes, PackageDescription="SOT, 0.95mm Pitch; 3 Pin, 1.315mm W X 2.95mm L X 1.15mm H body, IPC Medium Density", Part Description="Small Signal Zener Diode", Part Number=BZX84B10V, Pin Count=2, PressFit=No, Sense=No, SMD=Yes, Socket=No
IC1: "DP83869HM High Immunity 10/100/1000 Ethernet Physical Layer Transceiver WithCopper and Fiber Interface", Case=QFN48, Manufacturer="TEXAS INSTRUMENTS", Author="CERN DEM HF", Bonding=No, Component Type=Standard, ComponentHeight=1mm, CreateDate=24.04.2024, Device=DP83869HMRGZ, HelpURL=\\cern.ch\dfs\Applications\Altium\Datasheets\DP83869HMRGZ.pdf, LatestRevisionDate=24.04.2024, Manufacturer Part Number=DP83869HMRGZ, Mounted=Yes, PackageDescription="QFN, 0.50mm Pitch, Square; 48 Pin, 7.00mm L X 7.00mm W X 1.00mm H body (w/Thermal Tab 4.20 X 4.20mm), IPC Medium Density", Part Description="High Immunity 10/100/1000 Ethernet Physical Layer Transceiver with Copper and Fiber Interface", Part Number=DP83869HMRGZ, Pin Count=48, PressFit=No, Sense=No, SMD=Yes, Socket=No
IC2: "Computer-On-Modules - COM QSMP/QS93", Case=QFP100, Manufacturer=KARO, Manufacturer Part Number=QSMP-1530, Author="CERN DEM HF", Bonding=No, Component Type=Standard, ComponentHeight=2.3mm, CreateDate=22.04.2024, Device=QSMP-QS93, HelpURL=\\cern.ch\dfs\Applications\Altium\Datasheets\KARO_QSMP-1530.pdf, LatestRevisionDate=22.04.2024, Mounted=Yes, PackageDescription="QFN, 0.65mm Pitch, 100 Pin,27.35mm L X 27.35mm W X 2.3mm H Body (w/Thermal Tab 24.3 X 24.3mm)", Part Description="Computer-On-Modules - COM QSMP/153A/256S/4GF/E85", Part Number=QSMP-QS93, Pin Count=106, PressFit=No, Sense=No, SMD=Yes, Socket=No, Status="Not Recommended"
IC4: library part MPM54304GMN-XXXX, "Quad-Output Power Module with I2C and MTP", Case=QFN32, Manufacturer="MPS (MONOLITIC  POWER SYSTEMS)", Author="CERN DEM BC", Bonding=No, Component Type=Standard, ComponentHeight=2.1mm, CreateDate=09.11.2020, Device=MPM54304GMN-002, HelpURL=\\cern.ch\dfs\Applications\Altium\Datasheets\MPM54304GMN.pdf, LatestRevisionDate=23.11.2022, Manufacturer Part Number=MPM54304GMN-002, Mounted=Yes, PackageDescription="MPS LGA-33 Case, 0.65mm Pitch, Rect.; 32 Pin, 7.00mm L X 7.00mm W X 2.10mm H body (w/Thermal Tab 3.55 X 3.55mm)", Part Description="4V to 16V Input, Quad-Output Power Module with I2C and MTP", Part Number=MPM54304GMN-002, Pin Count=33, PressFit=No, Sense=No, SMD=Yes, Socket=No
J1 J2: "WR-PHD Socket Header, THT, Vertical, pitch 2.54mm, 2 Row, 26P", Contact Resistance=20mOhm, Manufacturer="Wurth Elektronik", Operating Temperature Max=125°C, Operating Temperature Min=-40°C, Rated Current=3A, Withstanding Voltage=500V, Working Voltage=250V, Category="Board-to-Board Connectors", ComponentLink1Description="Website Link", ComponentLink1URL=https://www.we-online.com/redexpert/article/61302621821?ad, ComponentLink2Description="Datasheet Link", ComponentLink2URL=https://www.we-online.com/redexpert/spec/61302621821?ad, Gender="Socket Header", Manufacturer Part Number=61302621821, Match Code=WR-PHD, Mount="Through Hole", Number of Pins=26, Number of Rows=2, Orientation=Vertical, Packaging=Tray, Pitch=2.54mm
J3: library part BELFUSE_L829-1J1T-43, "1 Port, RJ45, Gigabit Ethernet, MagJack Connector Module With Yellow And Green/Orange LEDs", Manufacturer="BEL MAGNETIC SOLUTIONS", Manufacturer Part Number=L829-1J1T-43, Author="CERN DEM JLC", Component Type=Standard, ComponentHeight=13.3mm, CreateDate=22.08.2011, Family=RJ45, HelpURL=\\cern.ch\dfs\Applications\Altium\Datasheets\BEL_L829-1J1T-43.pdf, LatestRevisionDate=20.09.2018, Mounted=Yes, Part Description="1 Port, Yellow/ Green-Orange LEDs,  RJ45 10/100/1000 Gigabit Ethernet, MagJack® Connector Module", Part Number=BELFUSE_L829-1J1T-43, Pin Count=19, PressFit=No, Sense=No, SMD=No, Socket=No, Status=None
J4: library part TYCO_1367073-1, "20 Position SFP  Connector (Small Form-factor Pluggable)", Manufacturer="TYCO ELECTRONICS", Manufacturer Part Number=1367073-1, Author="CERN DEM JLC", Component Type=Standard, ComponentHeight=5.4mm, ComponentLink1Description=Application, ComponentLink1URL=\\cern.ch\dfs\Applications\Altium\Datasheets\TYCO_SFP_Application.pdf, ComponentLink2Description="SFP Specification", ComponentLink2URL=\\cern.ch\dfs\Applications\Altium\Datasheets\Tyco_SFP_Specification.pdf, CreateDate=25/01/2010, Family=SFP, HelpURL=\\cern.ch\dfs\Applications\Altium\Datasheets\TYCO_1367073-1.pdf, LatestRevisionDate=25/01/2010, Mounted=Yes, Part Description="20 Position, Pitch 0.8mm SFP  Receptacle (Small Form-factor Pluggable)", Part Number=TYCO_1367073-1, Pin Count=20, SMD=Yes, Socket=No, Status=None, Table=TYCO
J5: library part CMP-245163-000001-1, "CONN RCPT USB2.0 TYPEC 5A", Current Rating=5/6.25/1.25/0.25A, Manufacturer=GCT, Package=0, Temperature="-40°C to +85°C", Temperature Range High=+85°C, Temperature Range Low=-40°C, Voltage Rating=20V, Automotive=No, Category=Conn, ComponentLink2Description=Datasheet, ComponentLink2URL=https://gct.co/files/drawings/usb4105.pdf, Conn Orientation="Right Angle", Contact Material=Gold,Nickel, Device Class L1=Connectors, Device Class L2="USB Connectors", Device Class L3=unset, Digikey Description="CONN RCPT USB2.0 TYPEC 5A", Height=3.46mm, Is Female=yes, Lead Free=Yes, Manufacturer Part Number=USB4105-GF-A, Number Of Contacts=16, Octopart=https://octopart.com/usb4105-gf-a-gct-106627878, RoHS=TRUE, USB Standard="USB 2.0"
J6: library part SAMTEC_TSW-107-07-L-S-LL, "Connector 7 Male", Manufacturer=SAMTEC, Manufacturer Part Number=TSW-107-07-L-S-LL, Author="CERN DEM MR", Component Type=Standard, ComponentHeight=8.38mm, CreateDate=07.12.2016, Family="Header 7", HelpURL=\\cern.ch\dfs\Applications\Altium\Datasheets\SAMTEC_TSW-107-07-L-S-LL.pdf, LatestRevisionDate=07.12.2016, Mounted=Yes, Part Description="7 Contacts, Pitch 2.54mm, Single Row  Through Mount Straigh Header (Post Lead 5.84mm, Tail Lead 2.54mm, Insulator 2.54mm)", Part Number=SAMTEC_TSW-107-07-L-S-LL, Pin Count=7, PressFit=No, Sense=No, SMD=No, Socket=No, Status=None
J7: library part 3M_N2506-6002RB, "Connector 6 Male", Manufacturer=3M, Manufacturer Part Number=N2506-6002RB, Author="CERN DEM JLC", Component Type=Standard, ComponentHeight=9.91mm, CreateDate=19.04.2018, Family="Header 6", HelpURL=\\cern.ch\dfs\Applications\Altium\Datasheets\3M_N2506-6002RB.pdf, LatestRevisionDate=19.04.2018, Mounted=Yes, Part Description="6 Contacts, Straight .100'' x .100'' Low Profile Four-Wall Header, (Solder Tail 2.84mm), 2500 Series", Part Number=3M_N2506-6002RB, Pin Count=6, PressFit=No, Sense=No, SMD=No, Socket=No, Status=None
J8: "WR-PHD Socket Header, THT, Vertical, pitch 2.54mm, 2 Row, 8P", Contact Resistance=20mOhm, Manufacturer="Wurth Elektronik", Operating Temperature Max=125°C, Operating Temperature Min=-40°C, Rated Current=3A, Withstanding Voltage=500V, Working Voltage=250V, Category="Board-to-Board Connectors", ComponentLink1Description="Website Link", ComponentLink1URL=https://www.we-online.com/redexpert/article/61300821821?ad, ComponentLink2Description="Datasheet Link", ComponentLink2URL=https://www.we-online.com/redexpert/spec/61300821821?ad, Gender="Socket Header", Manufacturer Part Number=61300821821, Match Code=WR-PHD, Mount="Through Hole", Number of Pins=8, Number of Rows=2, Orientation=Vertical, Packaging=Tray, Pitch=2.54mm
J9: library part ATTEND_112A-TAAR-R03, "Connector MicroSD 8 Pin + Switch", Manufacturer=ATTEND, Manufacturer Part Number=112A-TAAR-R03, Author="CERN DEM JMW", Component Type=Standard, ComponentHeight=1.9mm, CreateDate=07.07.2015, Family=microSD, HelpURL=\\cern.ch\dfs\Applications\Altium\Datasheets\ATTEND_112A-TAAR-R03.pdf, LatestRevisionDate=07.07.2015, Mounted=Yes, Part Description="MicroSD Socket, Push-Push Type", Part Number=ATTEND_112A-TAAR-R03, Pin Count=10, PressFit=No, Sense=No, SMD=Yes, Socket=No, Status=None
L1 L2 L3 L4: library part IND0805_MURATA_BLM21PG221SN1D, "Inductor", Case=0805, Manufacturer=MURATA, Manufacturer Part Number=BLM21PG221SN1D, Power=2A, Resistance=0.05R, Tolerance=±25%, Author="CERN DEM JLC", Component Type=Standard, ComponentHeight=1.05mm, CreateDate=25/01/2010, HelpURL=\\cern.ch\dfs\Applications\Altium\Datasheets\IND0402_MURATA_BLM21P.pdf, LatestRevisionDate=25/01/2010, Mounted=Yes, Part Description="SMD EMIFIL Suppression Chip Bead Ferrite", Part Number=IND0805_MURATA_BLM21PG221SN1D, Pin Count=2, SMD=Yes, Socket=No, Status=None, Table="Inductors SMD"
R1 R4 R6 R38: library part R0402_240R_1%_0.0625W_100PPM, "Resistor - 1%", Case=0402, Manufacturer=GENERIC, Manufacturer1 ComponentHeight=0.4mm, Manufacturer1 Example="YAGEO PHYCOMP", Manufacturer1 Part Number=232270672401L, Power=0.0625W, Tolerance=±1%, Author="CERN DEM JLC", Component Type=Standard, CreateDate=03.12.2007, HelpURL=\\cern.ch\dfs\Applications\Altium\Datasheets\R0402_Phycomp_RC0402.pdf, LatestRevisionDate=17.10.2012, Manufacturer Part Number=R0402_240R_1%_0.0625W_100PPM, Mounted=Yes, Part Description="General Purpose Thick Film Chip Resistor", Part Number=R0402_240R_1%_0.0625W_100PPM, Pin Count=2, PressFit=No, Sense=No, SMD=Yes, Socket=No, Status="Not Recommended", TC=±100ppm/°C
R2 R7 R8 R10 R11 R12 R20 R22 R23 R37 R41 R71 R72 R73 R74 R75 R76 R77 R78 R79 R80 R81 R82 R83: library part R0402_10K_1%_0.0625W_100PPM, "Resistor - 1%", Case=0402, Manufacturer=GENERIC, Manufacturer1 ComponentHeight=0.4mm, Manufacturer1 Example="YAGEO PHYCOMP", Manufacturer1 Part Number=232270671003L, Power=0.0625W, Tolerance=±1%, Author="CERN DEM JLC", Component Type=Standard, CreateDate=03.12.2007, HelpURL=\\cern.ch\dfs\Applications\Altium\Datasheets\R0402_Phycomp_RC0402.pdf, LatestRevisionDate=17.10.2012, Manufacturer Part Number=R0402_10K_1%_0.0625W_100PPM, Mounted=Yes, Part Description="General Purpose Thick Film Chip Resistor", Part Number=R0402_10K_1%_0.0625W_100PPM, Pin Count=2, PressFit=No, Sense=No, SMD=Yes, Socket=No, Status="Not Recommended", TC=±100ppm/°C
R3 R18 R21 R53 R54 R55 R56 R57 R58: library part R0402_22R_1%_0.0625W_100PPM, "Resistor - 1%", Case=0402, Manufacturer=GENERIC, Manufacturer1 ComponentHeight=0.4mm, Manufacturer1 Example="YAGEO PHYCOMP", Manufacturer1 Part Number=232270672209L, Power=0.0625W, Tolerance=±1%, Author="CERN DEM JLC", Component Type=Standard, CreateDate=03.12.2007, HelpURL=\\cern.ch\dfs\Applications\Altium\Datasheets\R0402_Phycomp_RC0402.pdf, LatestRevisionDate=17.10.2012, Manufacturer Part Number=R0402_22R_1%_0.0625W_100PPM, Mounted=Yes, Part Description="General Purpose Thick Film Chip Resistor", Part Number=R0402_22R_1%_0.0625W_100PPM, Pin Count=2, PressFit=No, Sense=No, SMD=Yes, Socket=No, Status="Not Recommended", TC=±100ppm/°C
R5: library part R0402_11K_1%_0.0625W_100PPM, "Resistor - 1%", Case=0402, Manufacturer=GENERIC, Manufacturer1 ComponentHeight=0.4mm, Manufacturer1 Example="YAGEO PHYCOMP", Manufacturer1 Part Number=232270671103L, Power=0.0625W, Tolerance=±1%, Author="CERN DEM JLC", Component Type=Standard, CreateDate=03.12.2007, HelpURL=\\cern.ch\dfs\Applications\Altium\Datasheets\R0402_Phycomp_RC0402.pdf, LatestRevisionDate=17.10.2012, Manufacturer Part Number=R0402_11K_1%_0.0625W_100PPM, Mounted=Yes, Part Description="General Purpose Thick Film Chip Resistor", Part Number=R0402_11K_1%_0.0625W_100PPM, Pin Count=2, PressFit=No, Sense=No, SMD=Yes, Socket=No, Status="Not Recommended", TC=±100ppm/°C
R9 R15 R16 R17 R19 R24 R25 R27 R28 R29 R30 R31 R32 R33 R42 R45: library part R0402_0R_JUMPER, "Resistor", Case=0402, Manufacturer=GENERIC, Manufacturer1 ComponentHeight=0.4mm, Manufacturer1 Example="YAGEO PHYCOMP", Manufacturer1 Part Number=232270591001L, Author="CERN DEM JLC", Component Type=Standard, CreateDate=03.12.2007, HelpURL=\\cern.ch\dfs\Applications\Altium\Datasheets\R0402_Phycomp_RC0402.pdf, LatestRevisionDate=17.10.2012, Manufacturer Part Number=R0402_0R_JUMPER, Mounted=Yes, Part Description="1A (0.05R Max DC Resistance) Zero Ohm Jumper", Part Number=R0402_0R_JUMPER, Pin Count=2, PressFit=No, Sense=No, SMD=Yes, Socket=No, Status="Not Recommended"
R13 R14: library part R0402_5K1_1%_0.0625W_100PPM, "Resistor - 1%", Case=0402, Manufacturer=GENERIC, Manufacturer1 ComponentHeight=0.4mm, Manufacturer1 Example="YAGEO PHYCOMP", Manufacturer1 Part Number=232270675102L, Power=0.0625W, Tolerance=±1%, Author="CERN DEM JLC", Component Type=Standard, CreateDate=03.12.2007, HelpURL=\\cern.ch\dfs\Applications\Altium\Datasheets\R0402_Phycomp_RC0402.pdf, LatestRevisionDate=17.10.2012, Manufacturer Part Number=R0402_5K1_1%_0.0625W_100PPM, Mounted=Yes, Part Description="General Purpose Thick Film Chip Resistor", Part Number=R0402_5K1_1%_0.0625W_100PPM, Pin Count=2, PressFit=No, Sense=No, SMD=Yes, Socket=No, Status="Not Recommended", TC=±100ppm/°C
R26 R59 R61 R62 R63 R64 R65: library part R0402_1K_1%_0.0625W_100PPM, "Resistor - 1%", Case=0402, Manufacturer=GENERIC, Manufacturer1 ComponentHeight=0.4mm, Manufacturer1 Example="YAGEO PHYCOMP", Manufacturer1 Part Number=232270671002L, Power=0.0625W, Tolerance=±1%, Author="CERN DEM JLC", Component Type=Standard, CreateDate=03.12.2007, HelpURL=\\cern.ch\dfs\Applications\Altium\Datasheets\R0402_Phycomp_RC0402.pdf, LatestRevisionDate=17.10.2012, Manufacturer Part Number=R0402_1K_1%_0.0625W_100PPM, Mounted=Yes, Part Description="General Purpose Thick Film Chip Resistor", Part Number=R0402_1K_1%_0.0625W_100PPM, Pin Count=2, PressFit=No, Sense=No, SMD=Yes, Socket=No, Status="Not Recommended", TC=±100ppm/°C
R34 R43 R47 R50: library part R0805_0R_JUMPER, "Resistor", Case=0805, Manufacturer=GENERIC, Manufacturer1 ComponentHeight=0.6mm, Manufacturer1 Example="NIC COMPONENT", Manufacturer1 Part Number=NRC10Z0, Author="CERN DEM JLC", Component Type=Standard, CreateDate=03.12.2007, HelpURL=\\cern.ch\dfs\Applications\Altium\Datasheets\R0805_NIC_NRC.pdf, LatestRevisionDate=13.03.2008, Manufacturer Part Number=R0805_0R_JUMPER, Mounted=Yes, Part Description="2A (0.05R Max DC Resistance) Zero Ohm Jumper", Part Number=R0805_0R_JUMPER, Pin Count=2, PressFit=No, Sense=No, SMD=Yes, Socket=No, Status=Preferred
R35 R36 R51: library part R0402_68K_1%_0.0625W_100PPM, "Resistor - 1%", Case=0402, Manufacturer=GENERIC, Manufacturer1 ComponentHeight=0.4mm, Manufacturer1 Example="YAGEO PHYCOMP", Manufacturer1 Part Number=232270676803L, Power=0.0625W, Tolerance=±1%, Author="CERN DEM JLC", Component Type=Standard, CreateDate=03.12.2007, HelpURL=\\cern.ch\dfs\Applications\Altium\Datasheets\R0402_Phycomp_RC0402.pdf, LatestRevisionDate=17.10.2012, Manufacturer Part Number=R0402_68K_1%_0.0625W_100PPM, Mounted=Yes, Part Description="General Purpose Thick Film Chip Resistor", Part Number=R0402_68K_1%_0.0625W_100PPM, Pin Count=2, PressFit=No, Sense=No, SMD=Yes, Socket=No, Status="Not Recommended", TC=±100ppm/°C